# EAGLE board darwin-radio-panel2 (EAGLE 9.4.2)
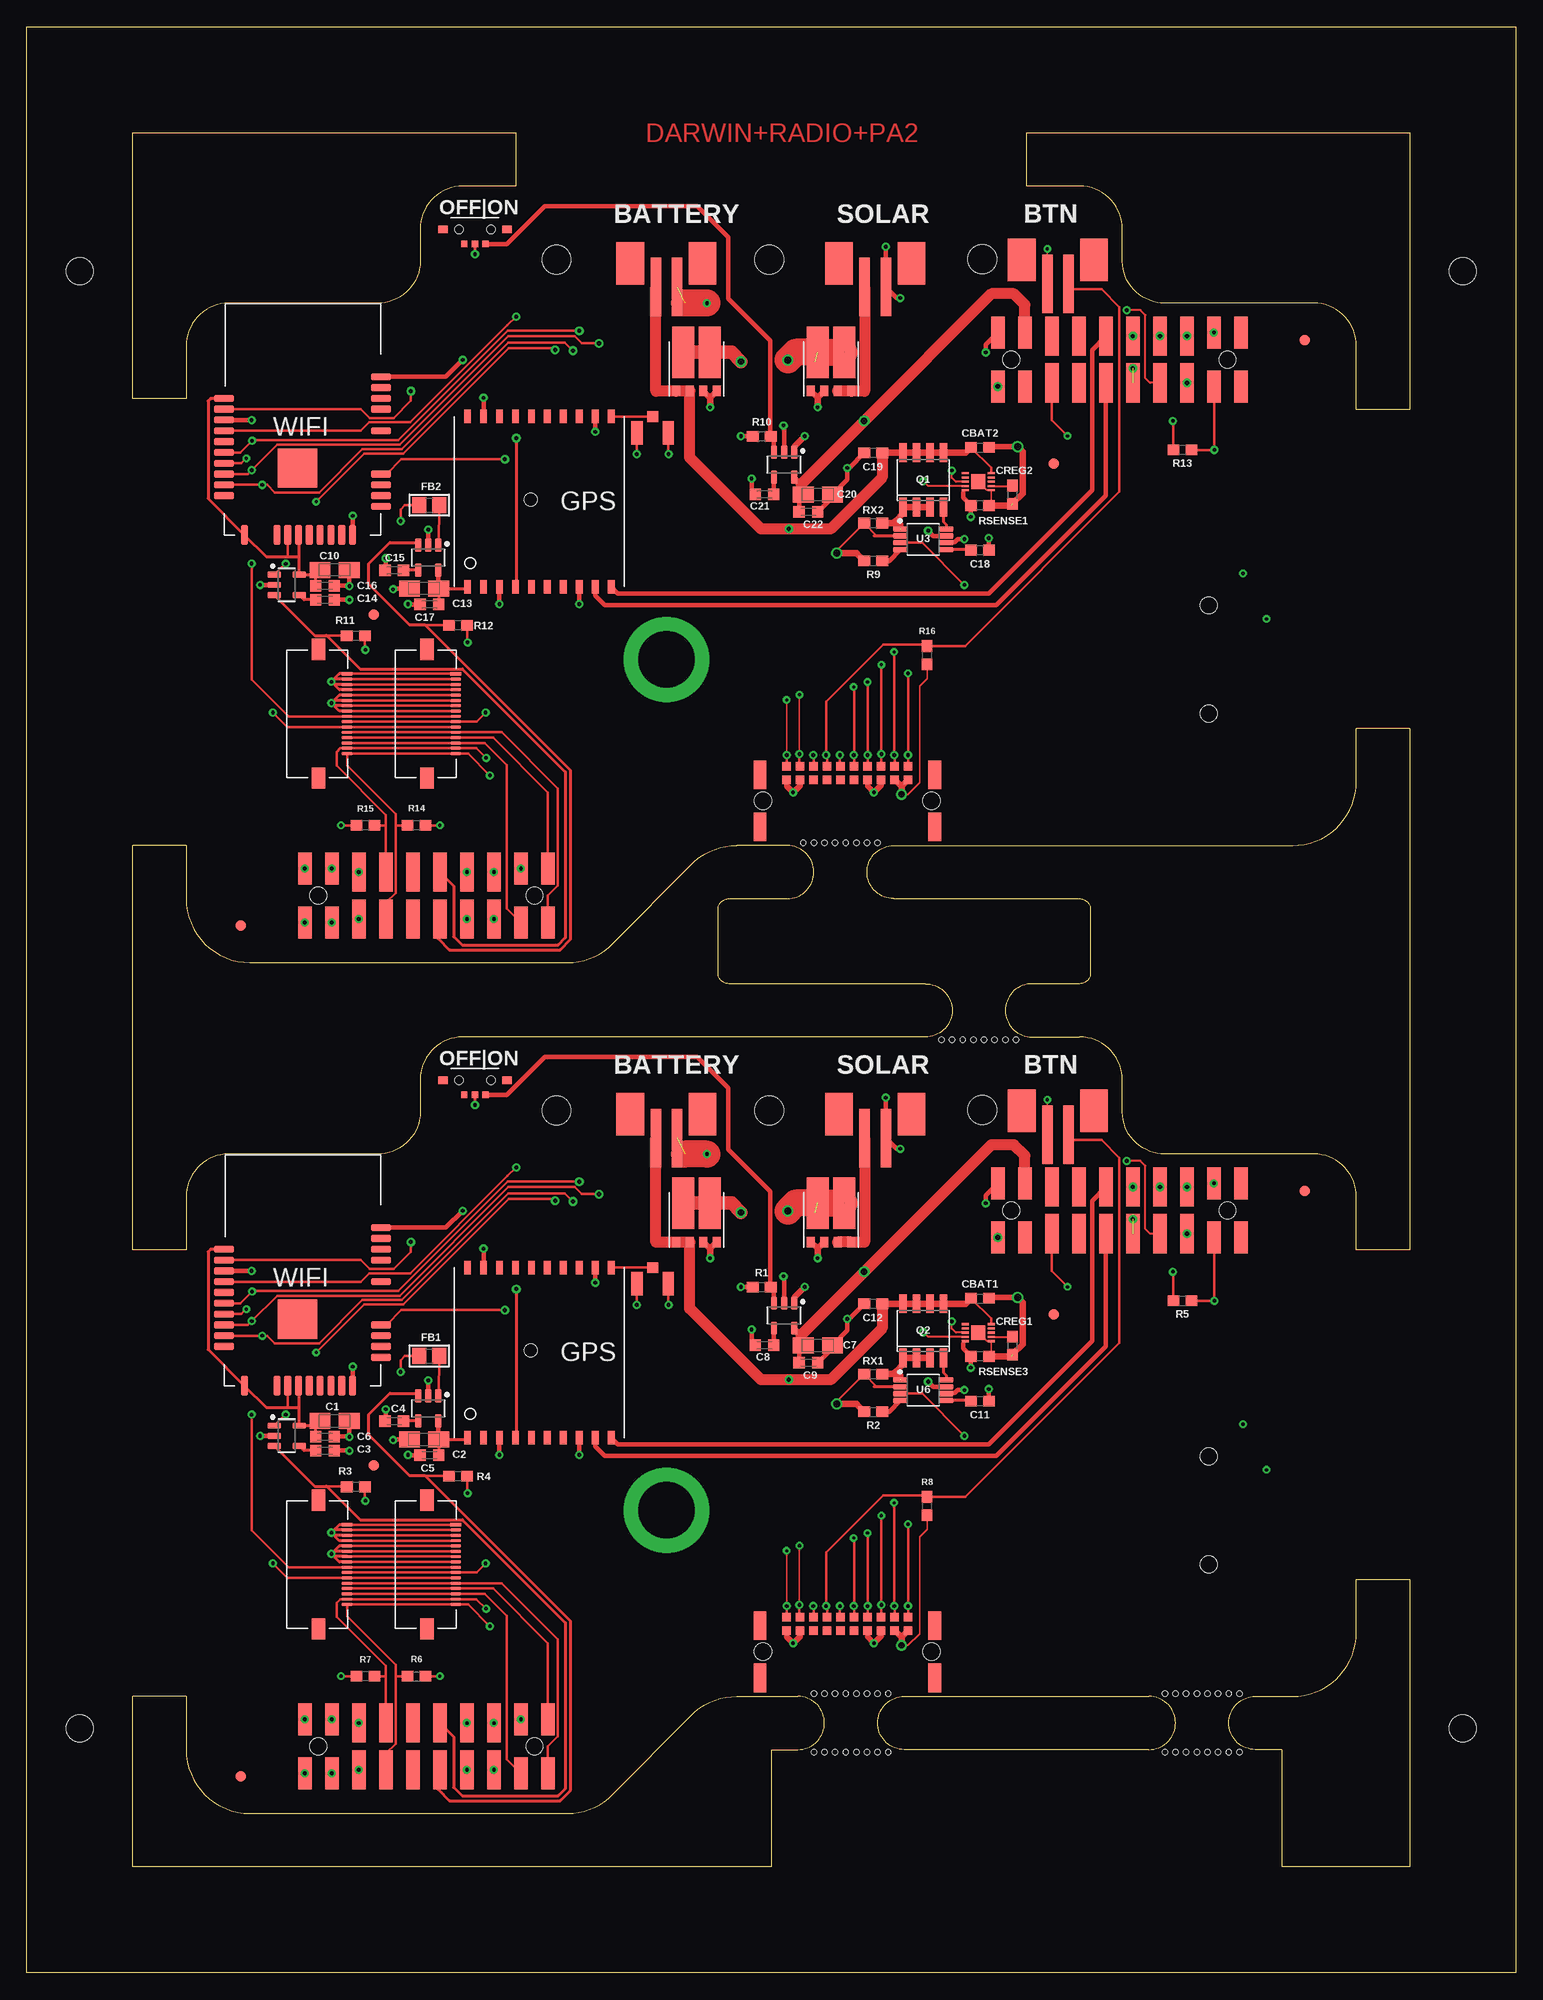
[diagram p0: board, top side]
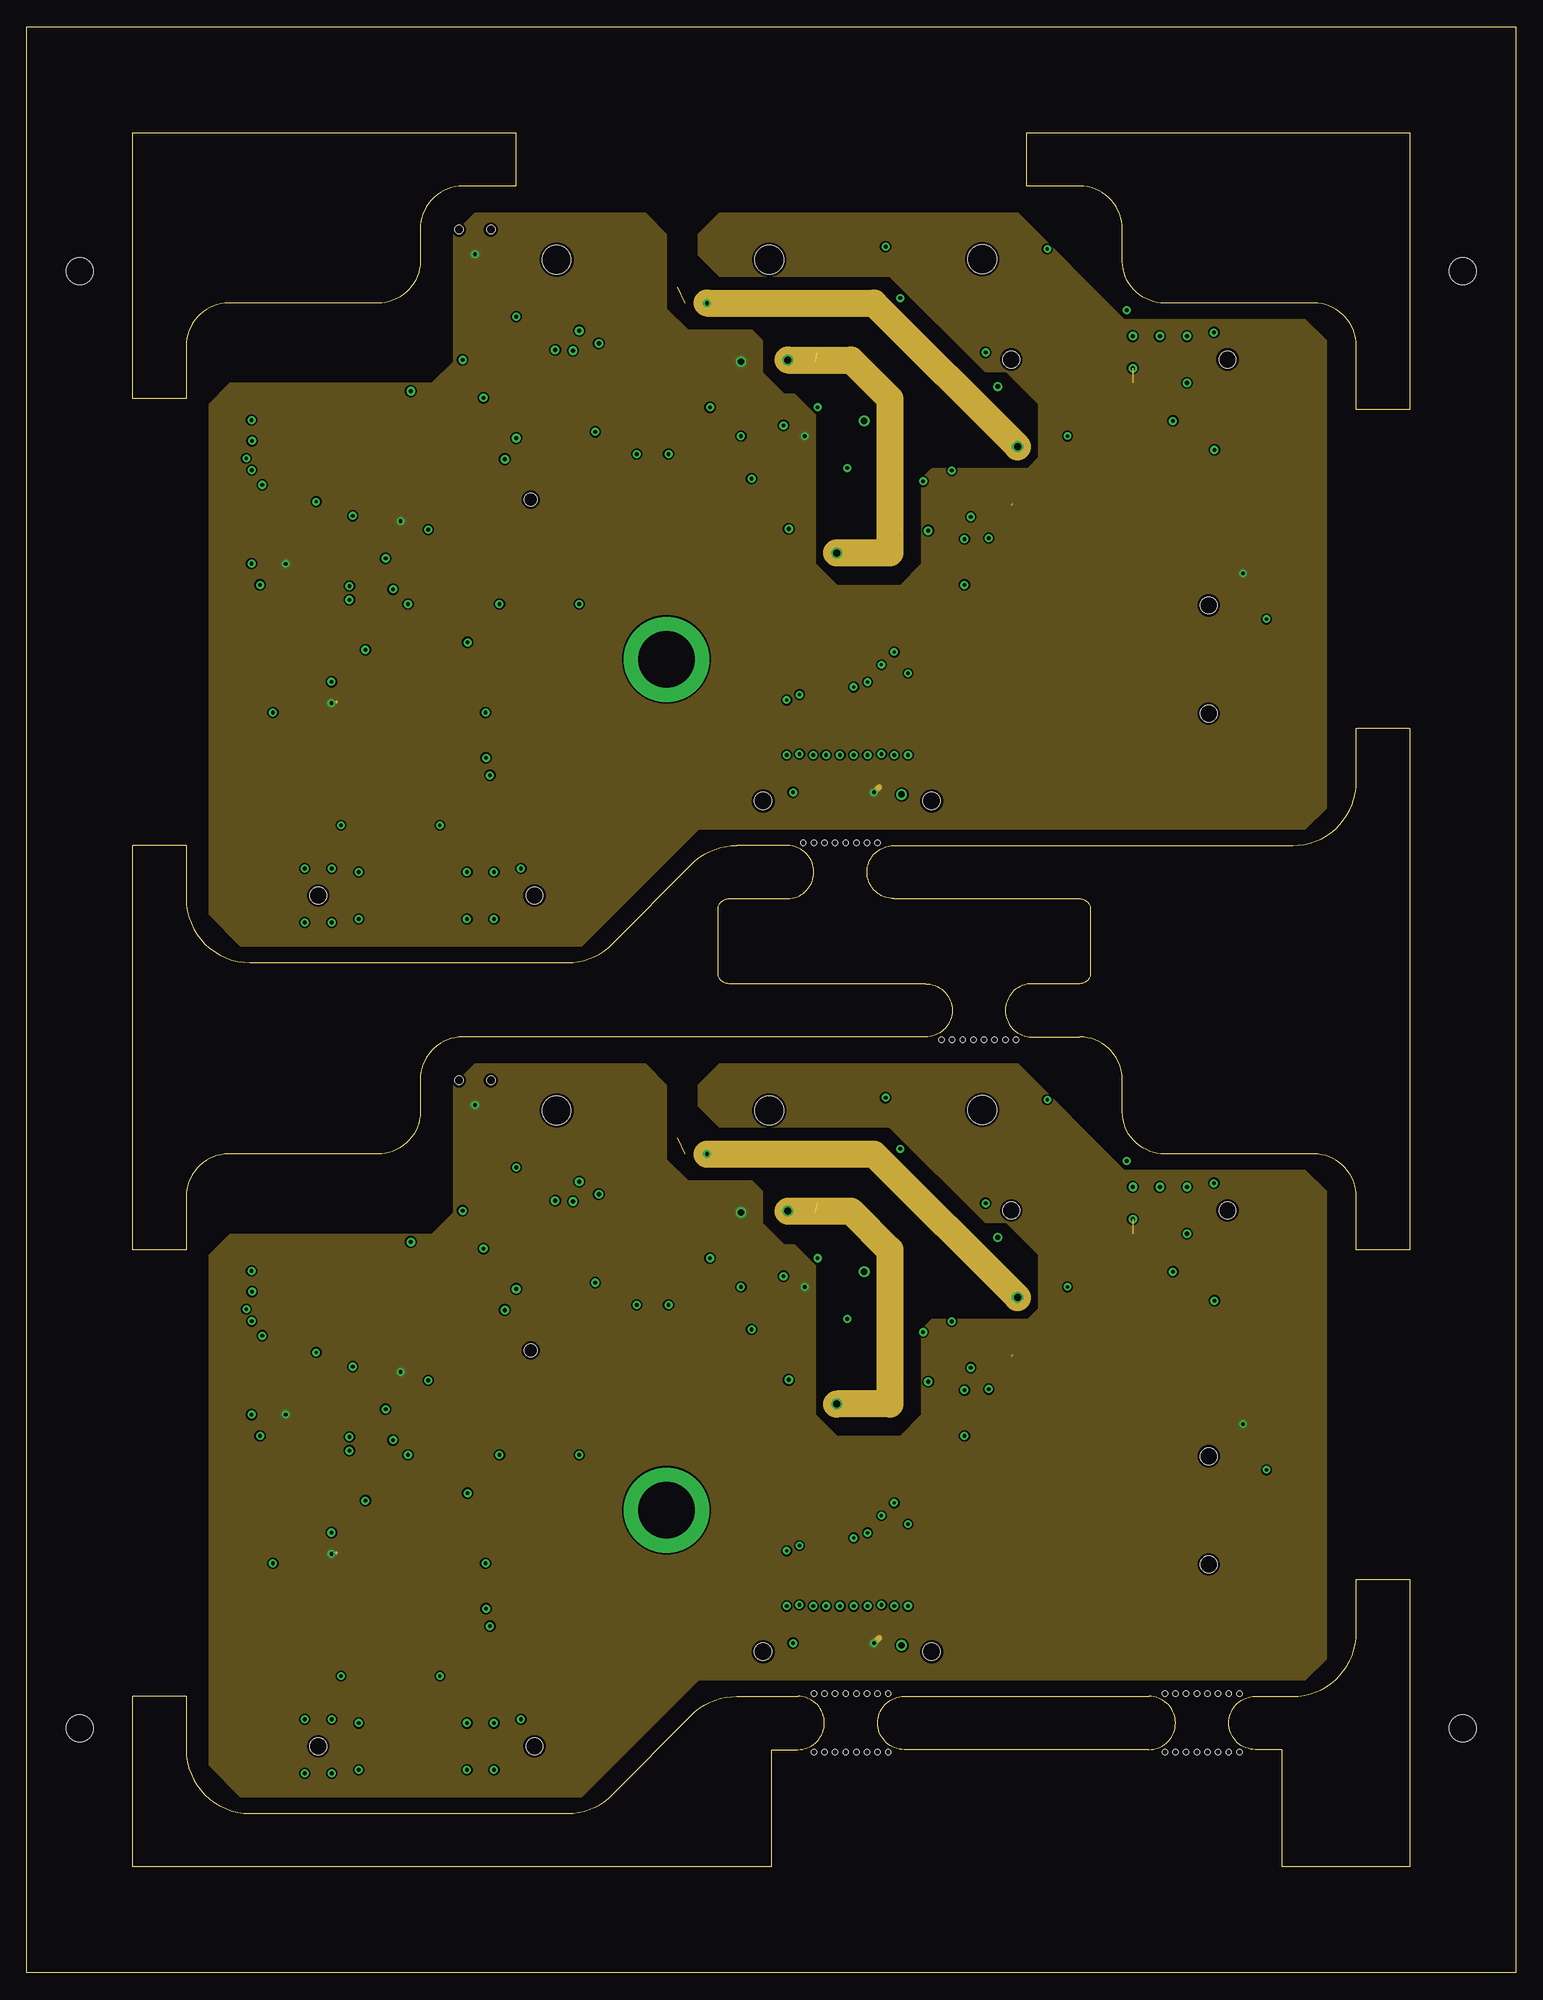
[diagram p1: board, inner layer PWR]
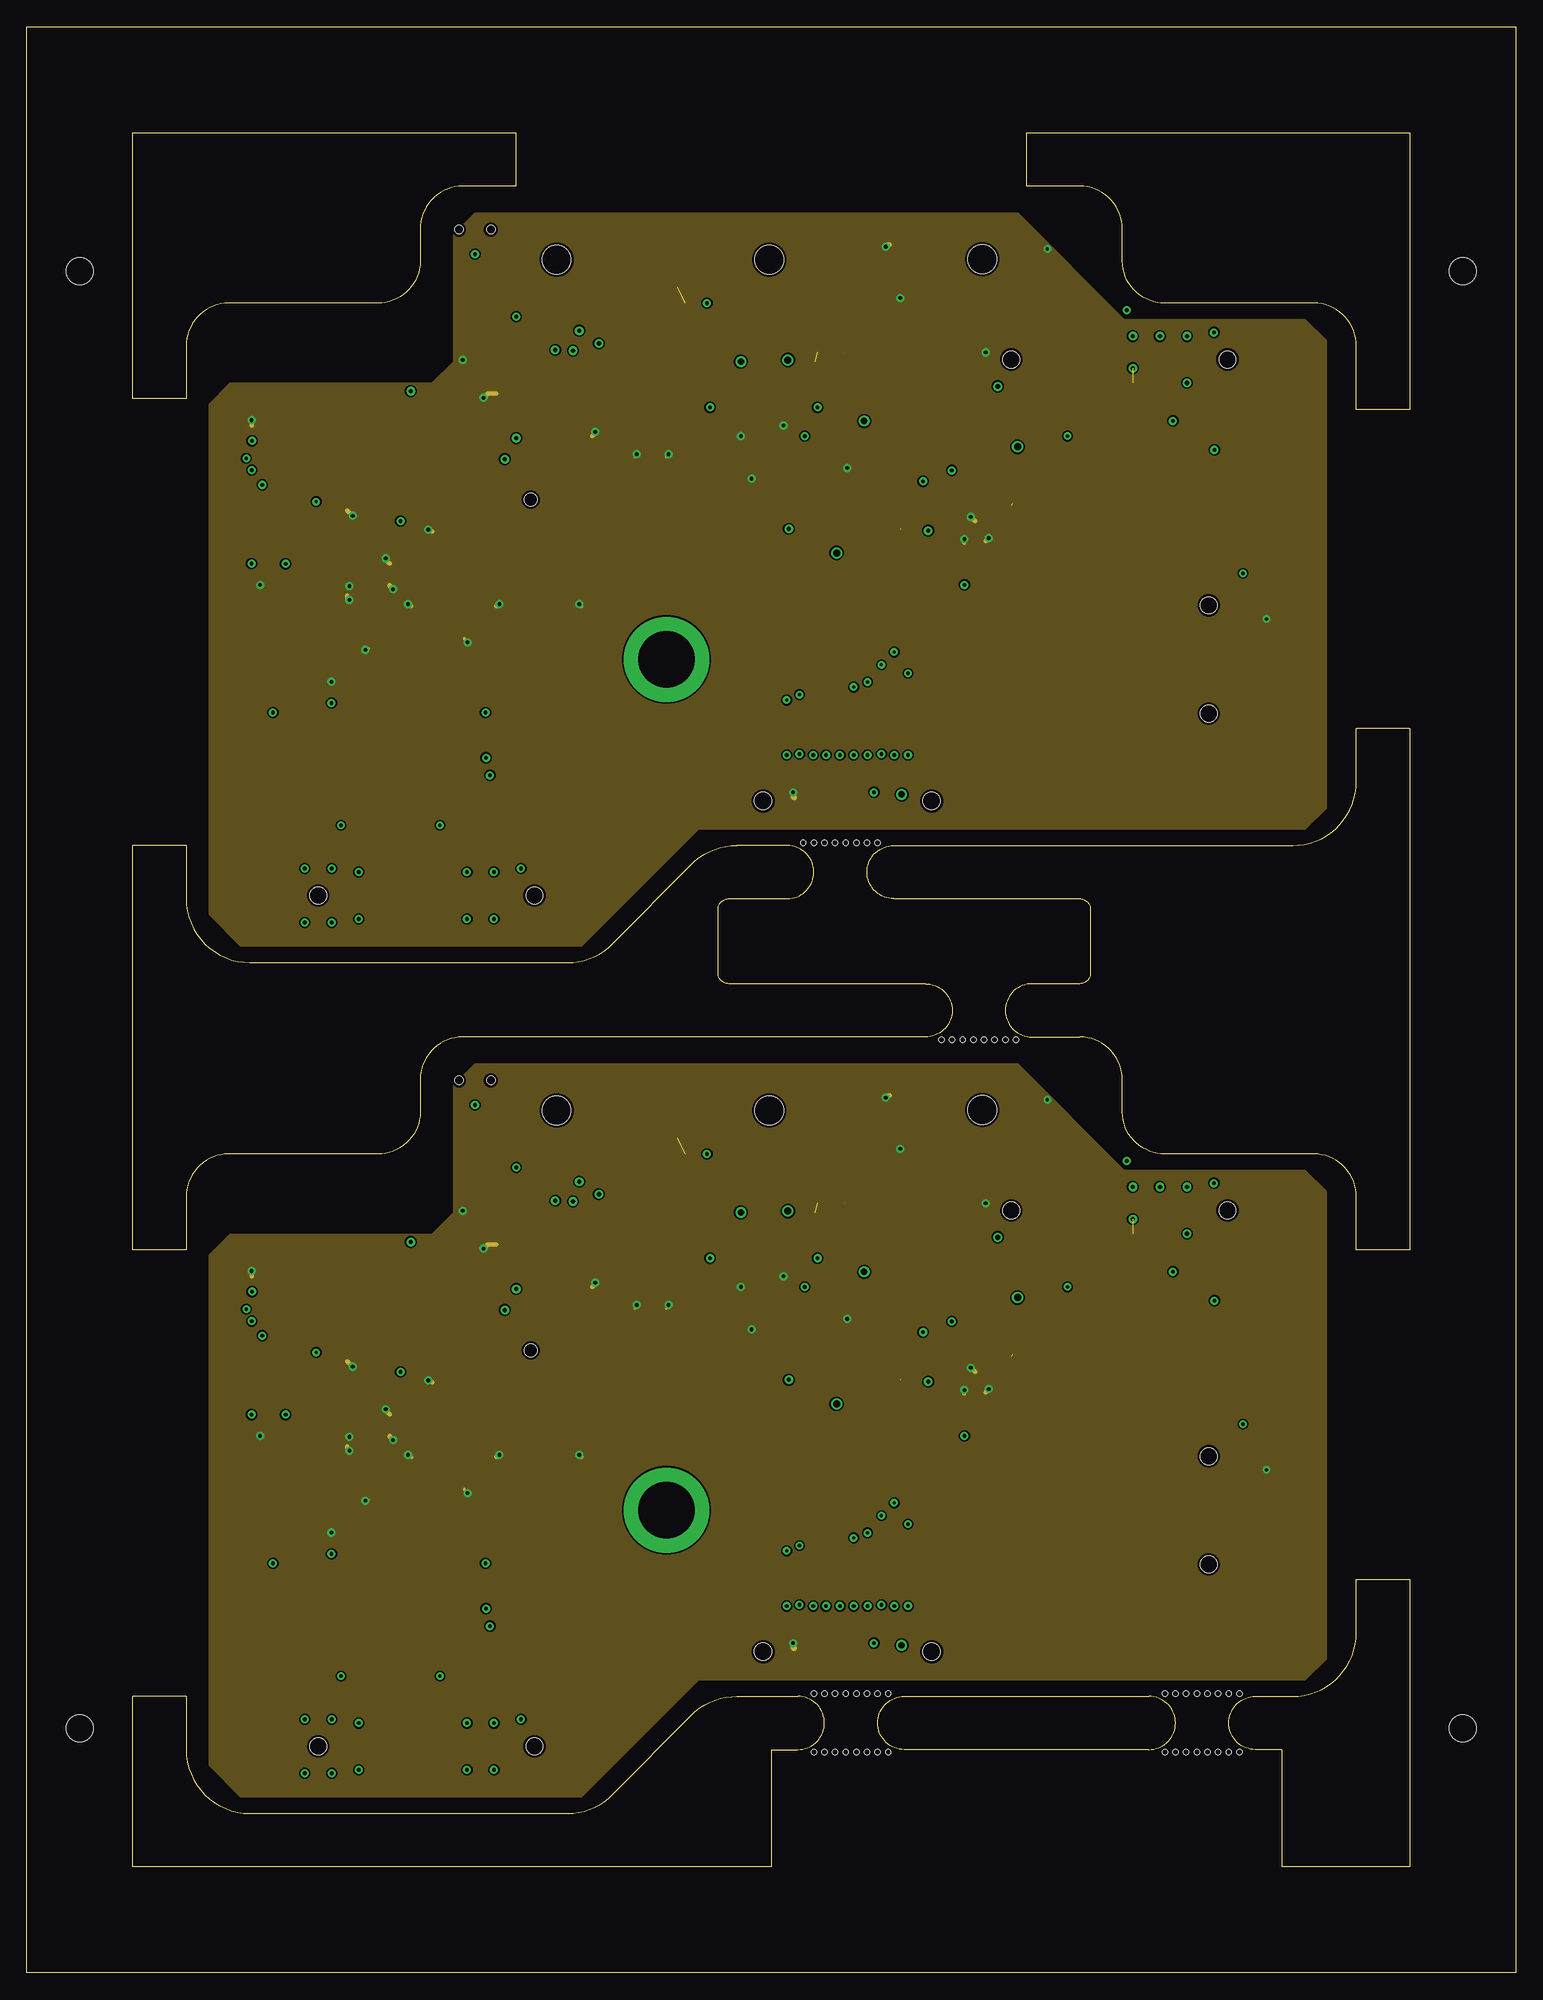
[diagram p2: board, inner layer GND]
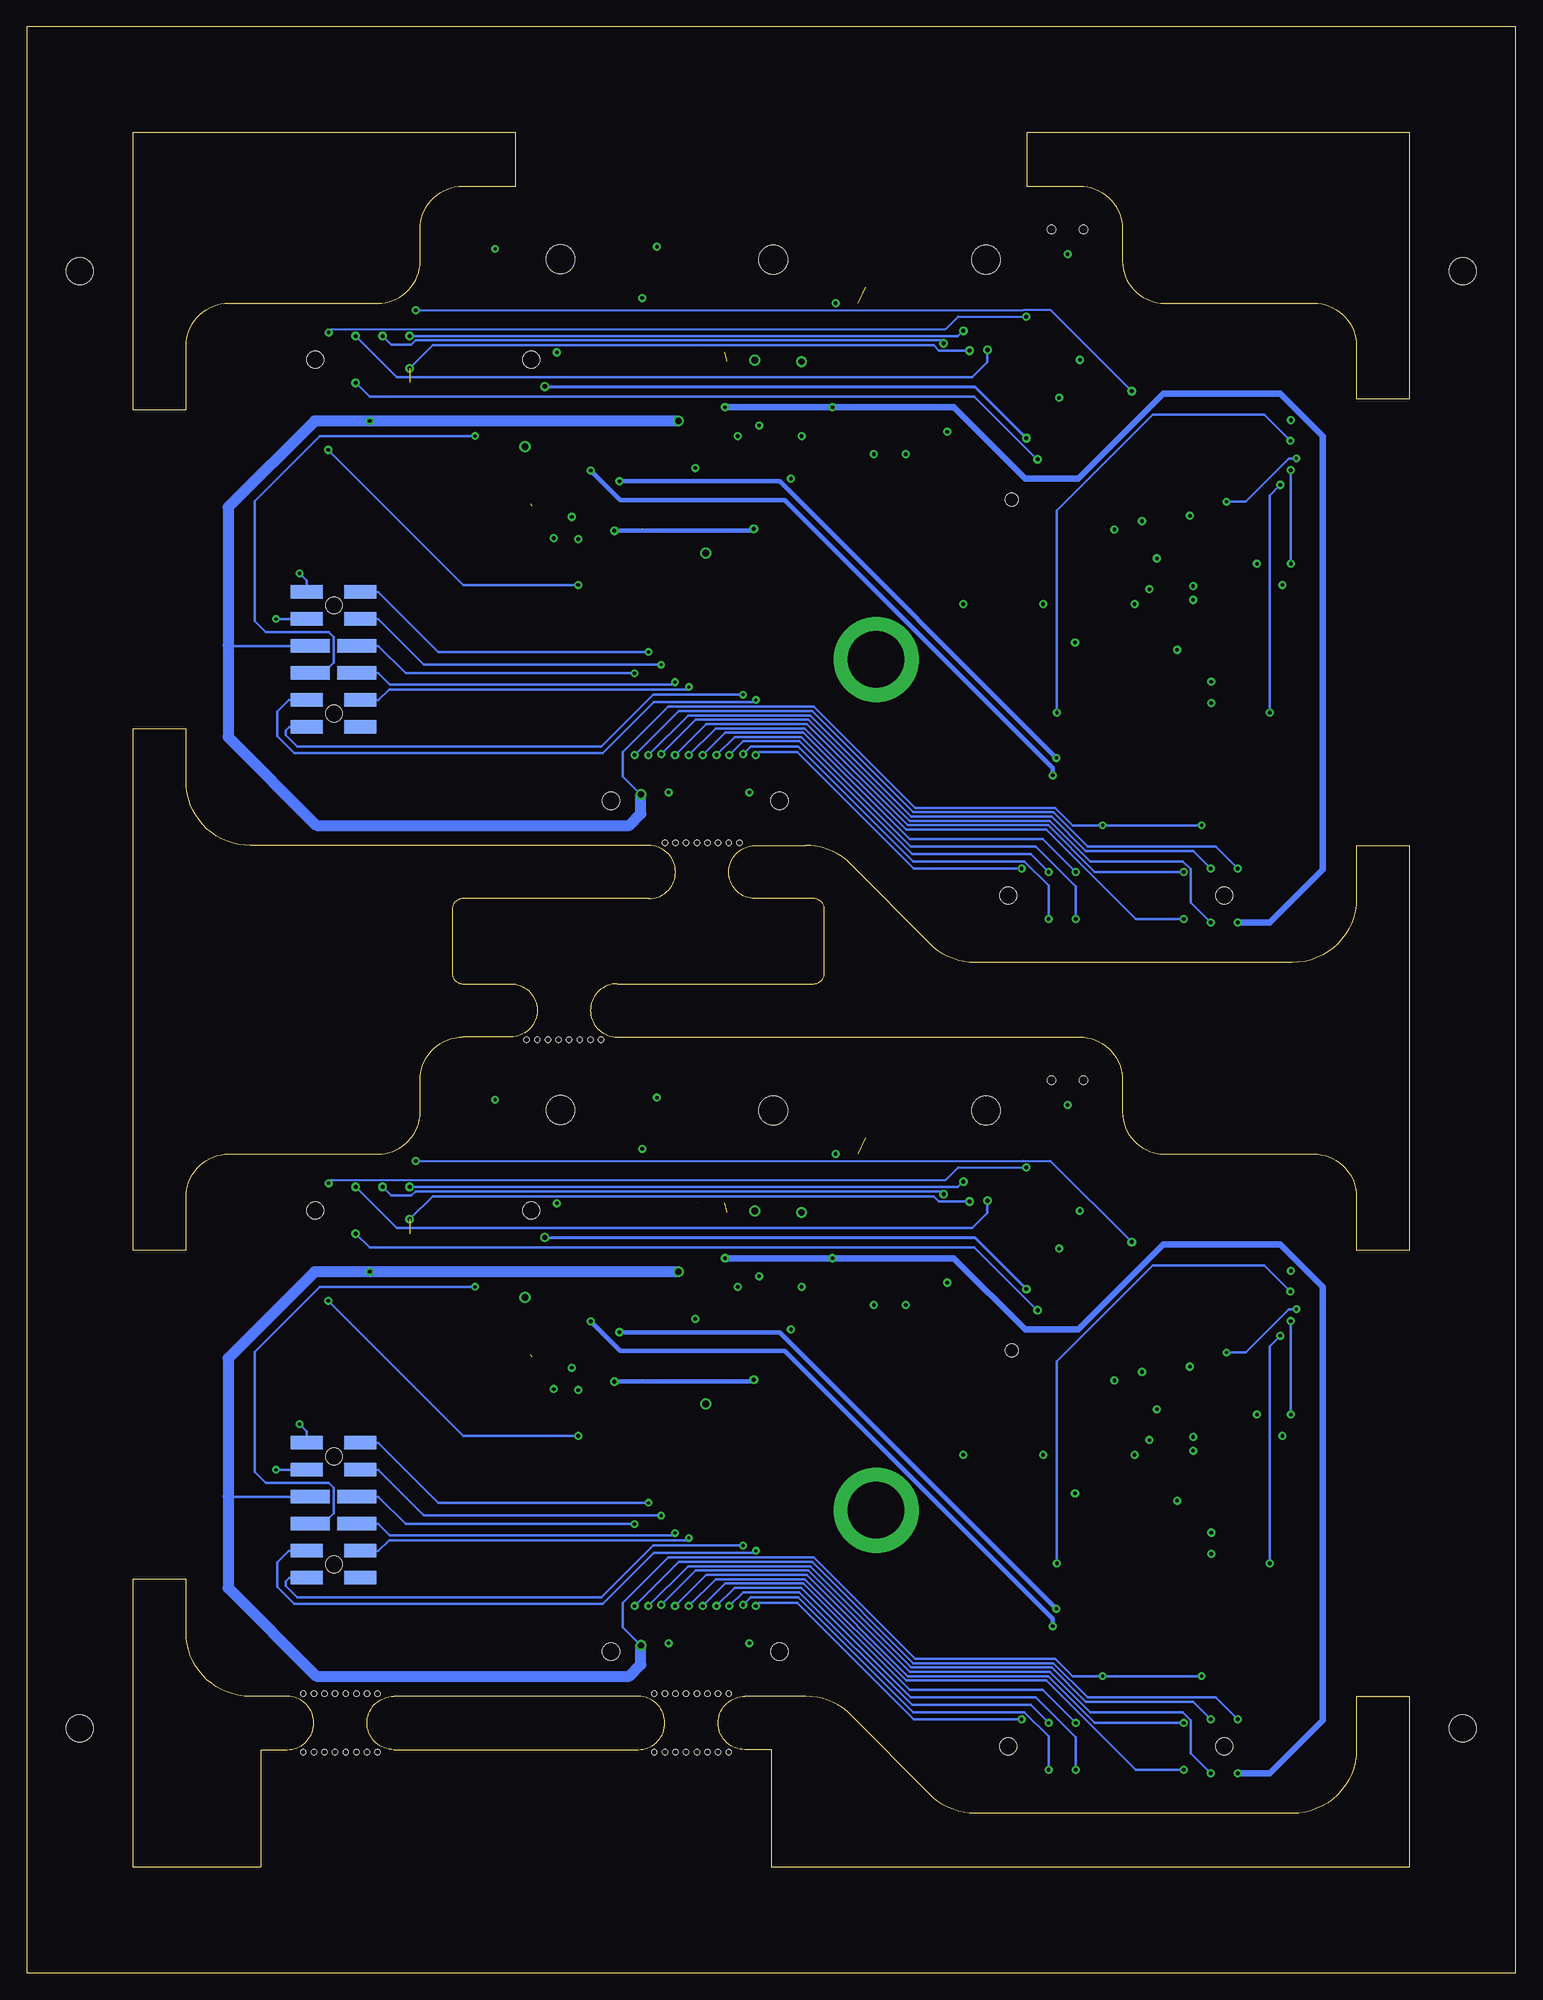
[diagram p3: board, bottom side, seen from below]

Size 140 x 183 mm. Coordinates in mm from the lower left corner, seen from the top.
Outline: 125,72.94 arc90 121,77 107,77 arc-90 103,80.94 103,83.94 arc90 99,88 94.5,88 arc-90 92,90.5 arc-90 94.5,93 99,93 arc90 100,94 100,100 arc90 99,101 81.5,101 arc-90 79,103.5 arc-90 81.5,106 119,106 arc90 125,112 125,117 130,117 130,68 125,68 125,72.94
Outline: 41,88 arc90 37,83.94 37,80.94 arc-90 33,77 19,77 arc90 15,72.94 15,68 10,68 10,106 15,106 15,101 arc90 21,95 50.85,95 arc45 55.11,96.78 62.49,104.22 arc-45 66.75,106 71.5,106 arc-90 74,103.5 arc-90 71.5,101 66,101 arc90 65,100 65,94 arc90 66,93 84.5,93 arc-90 87,90.5 arc-90 84.5,88 41,88
Outline: 15,21 arc90 21,15 50.85,15 arc45 55.11,16.78 62.49,24.23 arc-45 66.75,26 72.5,26 arc-90 75,23.5 arc-90 72.5,21 70,21 70,10 10,10 10,26 15,26 15,21
Outline: 119,26 arc90 125,32 125,37 130,37 130,10 118,10 118,21 115.5,21 arc-90 113,23.5 arc-90 115.5,26 119,26
Outline: 125,152.94 arc90 121,157 107,157 arc-90 103,160.94 103,163.94 arc90 99,168 94,168 94,173 130,173 130,147 125,147 125,152.94
Outline: 41,168 arc90 37,163.94 37,160.94 arc-90 33,157 19,157 arc90 15,152.94 15,148 10,148 10,173 46,173 46,168 41,168
Outline: 0,0 0,183 140,183 140,0 0,0
Outline: 82.5,21 arc-90 80,23.5 arc-90 82.5,26 105.5,26 arc-90 108,23.5 arc-90 105.5,21 82.5,21
Copper layers (1+2*15+16): Top 0.035mm / dielectric 1.5mm / PWR 0.035mm / dielectric 0.15mm / GND 0.035mm / dielectric 0.2mm / Bottom 0.035mm
Design rules "default *": minimum track width 6mil, minimum drill 0.3mm, track to track 6mil, track to pad 6mil, pad to pad 6mil, via to via 6mil, smd to smd 6mil, copper to edge 10mil, drill to drill 6mil, minimum pad ring 10mil, minimum via ring 8mil, stop-mask expansion 4mil, vias tented up to drill 1mm, thermal gap 10mil
Holes 2.7 mm at 49.82,81.08 69.82,81.08 89.82,81.13 49.82,161.08 69.82,161.08 89.82,161.13
Holes 2.54 mm at 5,160 135,160 135,23 5,23
Holes 0.5 mm at 73,106.25 74,106.25 75,106.25 76,106.25 77,106.25 78,106.25 79,106.25 80,106.25 93,87.75 92,87.75 91,87.75 90,87.75 89,87.75 88,87.75 87,87.75 86,87.75 74,20.75 75,20.75 76,20.75 77,20.75 78,20.75 79,20.75 80,20.75 81,20.75 74,26.25 75,26.25 76,26.25 77,26.25 78,26.25 79,26.25 80,26.25 81,26.25 107,20.75 108,20.75 109,20.75 110,20.75 111,20.75 112,20.75 113,20.75 114,20.75 107,26.25 108,26.25 109,26.25 110,26.25 111,26.25 112,26.25 113,26.25 114,26.25

## Footprints (pad centres in the part's own frame; a part is rotated, then mirrored left to right if it is on the bottom)
A/3216-18R = smd 1.95 x 1.5: + 1.375,0; - -1.375,0
C0603K = smd 1.05 x 1.08: 1 -0.875,0; 2 0.875,0
0603 = smd 1.1 x 1: 1 -0.85,0; 2 0.85,0
V10KL45DUHM3/H = smd 0.762 x 0.991: A1-1 -1.905,0.495; A1-2 -0.635,0.495; A2-1 0.635,0.495; A2-2 1.905,0.495 | smd 2.083 x 4.851: K1 -1.245,4.153; K2 1.245,4.153
0805 = smd 1.3 x 1.5: 1 -0.95,0; 2 0.95,0
FIDUCIAL_1MM = smd 1 x 1: 1 0,0
505110-1692 = smd 0.3 x 1: 1 -3.75,2.7; 2 -3.25,2.7; 3 -2.75,2.7; 4 -2.25,2.7; 5 -1.75,2.7; 6 -1.25,2.7; 7 -0.75,2.7; 8 -0.25,2.7; 9 0.25,2.7; 10 0.75,2.7; 11 1.25,2.7; 12 1.75,2.7; 13 2.25,2.7; 14 2.75,2.7; 15 3.25,2.7; 16 3.75,2.7 | smd 2 x 1.3: PAD1 -6.05,0; PAD2 6.05,0
M55-6102042R = smd 0.8 x 0.8: P1 -5.715,3.27; P2 -4.445,3.27; P3 -3.175,3.27; P4 -1.905,3.27; P5 -0.635,3.27; P6 0.635,3.27; P7 1.905,3.27; P8 3.175,3.27; P9 4.445,3.27; P10 5.715,3.27; P11 5.715,2; P12 4.445,2; P13 3.175,2; P14 1.905,2; P15 0.635,2; P16 -0.635,2; P17 -1.905,2; P18 -3.175,2; P19 -4.445,2; P20 -5.715,2 | smd 1.2 x 2.7: PAD0 -8.21,-2.45; PAD1 8.21,-2.45; PAD2 8.21,2.45; PAD3 -8.21,2.45 | hole 1.65: -7.925,0; 7.925,0
20PH = smd 3 x 1.27: PIN1 -0.34,0; PIN2 -0.34,-2.54; PIN9 -0.34,-20.32; PIN10 -0.34,-22.86; PIN11 4.74,-22.86; PIN12 4.74,-20.32; PIN19 4.74,-2.54; PIN20 4.74,0 | smd 3.68 x 1.27: PIN3 0,-5.08; PIN4 0,-7.62; PIN5 0,-10.16; PIN6 0,-12.7; PIN7 0,-15.24; PIN8 0,-17.78; PIN13 4.4,-17.78; PIN14 4.4,-15.24; PIN15 4.4,-12.7; PIN16 4.4,-10.16; PIN17 4.4,-7.62; PIN18 4.4,-5.08 | hole 1.58: 2.2,-1.27; 2.2,-21.59
SO08-IRF = smd 0.72 x 1.78: 1 -1.905,-2.543; 2 -0.635,-2.543; 3 0.635,-2.543; 4 1.905,-2.543; 5 1.905,2.543; 6 0.635,2.543; 7 -0.635,2.543; 8 -1.905,2.543
ATWINC = smd 1.9 x 0.7: 1 7.365,2.67; 2 7.365,3.686; 3 7.365,4.702; 4 7.365,5.718; 5 7.365,9.782; 6 7.365,11.814; 7 7.365,12.83; 8 7.365,13.846; 9 7.365,14.862; 10 -7.365,12.83; 11 -7.365,11.814; 12 -7.365,10.798; 13 -7.365,9.782; 14 -7.365,8.766; 15 -7.365,7.75; 16 -7.365,6.734; 17 -7.365,5.718; 18 -7.365,4.702; 19 -7.365,3.686 | smd 0.7 x 1.9: 20 -5.465,0; 21 -2.417,0; 22 -1.401,0; 23 -0.385,0; 24 0.631,0; 25 1.647,0; 26 2.663,0; 27 3.679,0; 28 4.695,0 | smd 3.7 x 3.7: PAD -0.485,6.27
SOP65P490X110-8 = smd 1.412 x 0.492: 1 -2.15,0.975; 2 -2.15,0.325; 3 -2.15,-0.325; 4 -2.15,-0.975; 5 2.15,-0.975; 6 2.15,-0.325; 7 2.15,0.325; 8 2.15,0.975
GPS_MODULE = smd 1.27 x 0.635: P$1 -8,6.75; P$2 -8,5.25; P$3 -8,3.75; P$4 -8,2.25; P$5 -8,0.75; P$6 -8,-0.75; P$7 -8,-2.25; P$8 -8,-3.75; P$9 -8,-5.25; P$10 -8,-6.75; P$11 8,-6.75; P$12 8,-5.25; P$13 8,-3.75; P$14 8,-2.25; P$15 8,-0.75; P$16 8,0.75; P$17 8,2.25; P$18 8,3.75; P$19 8,5.25; P$20 8,6.75 | hole 1.2: 0.2,0.8
SOT95P280X145-5 = smd 1.262 x 0.609: 1 -1.175,0.95; 2 -1.175,0; 3 -1.175,-0.95; 4 1.175,-0.95; 5 1.175,0.95
SSAJ110100 = smd 0.6 x 0.6: 1 1,1.355; 2 -1,1.355; C 0,1.355 | smd 0.9 x 0.7: PAD -3,0; PAD2 3,0 | hole 0.8: -1.5,0; 1.5,0
B2B-PH-SM4-TB = smd 1 x 5.5: + -1,-1; - 1,-1 | smd 2.6 x 4: PAD1 3.4,1.25; PAD2 -3.4,1.25
12PH = smd 3 x 1.27: 1 -2.5,6.35; 2 -2.5,3.81; 5 -2.5,-3.81; 6 -2.5,-6.35; 7 2.5,-6.35; 8 2.5,-3.81; 11 2.5,3.81; 12 2.5,6.35 | smd 3.68 x 1.27: 3 -2.2,1.27; 4 -2.2,-1.27; 9 2.2,-1.27; 10 2.2,1.27 | hole 1.58: 0.041,5.08; 0.041,-5.08
2337019-1 = smd 1.05 x 1: ANT 0,-1.525 | smd 1.05 x 2.2: GND -1.475,0; GND2 1.475,0
10DFN-EP = smd 0.2 x 0.65: P1 -0.8,-1.225; P2 -0.4,-1.225; P3 0,-1.225; P4 0.4,-1.225; P5 0.8,-1.225; P6 0.8,1.225; P7 0.4,1.225; P8 0,1.225; P9 -0.4,1.225; P10 -0.8,1.225 | smd 1.4 x 1.3: PAD 0,0

## Placement (x,y rotation side)
C1  6.8uf  [A/3216-18R]  28.94,51.91 180 top
C2  6.8uf  [A/3216-18R]  37.36,50.17 0 top
C3  [C0603K]  28.04,49.11 0 top
C4  [C0603K]  34.56,51.87 180 top
C5  .1uf  [C0603K]  37.86,48.67 180 top
C6  .1uf  [C0603K]  28.04,50.41 0 top
C7  6.8uf  [A/3216-18R]  74.38,59 180 top
C8  [C0603K]  69.36,59.04 180 top
C9  .1uf  [C0603K]  73.48,57.36 0 top
C10  6.8uf  [A/3216-18R]  28.94,131.91 180 top
C11  0.1uF  [0603]  89.61,53.77 0 top
C12  10uF  [0603]  79.58,62.92 180 top
C13  6.8uf  [A/3216-18R]  37.36,130.17 0 top
C14  [C0603K]  28.04,129.11 0 top
C15  [C0603K]  34.56,131.87 180 top
C16  .1uf  [C0603K]  28.04,130.41 0 top
C17  .1uf  [C0603K]  37.86,128.67 180 top
C18  0.1uF  [0603]  89.61,133.77 0 top
C19  10uF  [0603]  79.58,142.92 180 top
C20  6.8uf  [A/3216-18R]  74.38,139 180 top
C21  [C0603K]  69.36,139.04 180 top
C22  .1uf  [C0603K]  73.48,137.36 0 top
CBAT1  0.1uF  [0603]  89.61,63.43 0 top
CBAT2  0.1uF  [0603]  89.61,143.43 0 top
CREG1  10uF  [0603]  92.66,58.98 270 top
CREG2  10uF  [0603]  92.66,138.98 270 top
D1  V10KL45DUHM3/H  [V10KL45DUHM3/H]  62.97,68.23 0 top
D2  V10KL45DUHM3/H  [V10KL45DUHM3/H]  62.97,148.23 0 top
D3  V10KL45DUHM3/H  [V10KL45DUHM3/H]  75.61,68.23 0 top
D4  V10KL45DUHM3/H  [V10KL45DUHM3/H]  75.61,148.23 0 top
FB1  [0805]  37.85,58 0 top
FB2  [0805]  37.85,138 0 top
FID1  FIDUCIAL_1MM  [FIDUCIAL_1MM]  20.15,18.5 0 top
FID2  FIDUCIAL_1MM  [FIDUCIAL_1MM]  120.15,73.5 0 top
FID3  FIDUCIAL_1MM  [FIDUCIAL_1MM]  96.55,61.9 0 top
FID4  FIDUCIAL_1MM  [FIDUCIAL_1MM]  32.65,47.7 0 top
FID5  FIDUCIAL_1MM  [FIDUCIAL_1MM]  20.15,98.5 0 top
FID6  FIDUCIAL_1MM  [FIDUCIAL_1MM]  120.15,153.5 0 top
FID7  FIDUCIAL_1MM  [FIDUCIAL_1MM]  96.55,141.9 0 top
FID8  FIDUCIAL_1MM  [FIDUCIAL_1MM]  32.65,127.7 0 top
J1  505110-1692  [505110-1692]  27.43,38.4 270 top
J2  505110-1692  [505110-1692]  37.64,38.4 270 top
J3  M55-6102042R  [M55-6102042R]  77.15,30.2 0 top
J4  505110-1692  [505110-1692]  27.43,118.4 270 top
J5  505110-1692  [505110-1692]  37.64,118.4 270 top
J6  M55-6102042R  [M55-6102042R]  77.15,110.2 0 top
LOWER1  MOLEX-15-91-2200  [20PH]  49.01,23.5 270 top
LOWER2  MOLEX-15-91-2200  [20PH]  49.01,103.5 270 top
Q1  NDS8434  [SO08-IRF]  84.28,140.38 0 top
Q2  NDS8434  [SO08-IRF]  84.28,60.38 0 top
R1  100k  [0603]  69.11,64.48 0 top
R2  100k  [0603]  79.58,52.76 0 top
R3  100k  [0603]  30.95,45.7 180 top
R4  100k  [0603]  40.55,46.7 180 top
R5  100k  [0603]  108.65,63.2 0 top
R6  100k  [0603]  36.65,27.9 0 top
R7  100k  [0603]  31.85,27.9 180 top
R8  100k  [0603]  84.65,43.9 90 top
R9  100k  [0603]  79.58,132.76 0 top
R10  100k  [0603]  69.11,144.48 0 top
R11  100k  [0603]  30.95,125.7 180 top
R12  100k  [0603]  40.55,126.7 180 top
R13  100k  [0603]  108.65,143.2 0 top
R14  100k  [0603]  36.65,107.9 0 top
R15  100k  [0603]  31.85,107.9 180 top
R16  100k  [0603]  84.65,123.9 90 top
RSENSE1  100M  [0603]  89.61,137.97 180 top
RSENSE3  100M  [0603]  89.61,57.97 180 top
RX1  100M  [0603]  79.58,56.31 0 top
RX2  100M  [0603]  79.58,136.31 0 top
U1  ATWINC  [ATWINC]  25.94,55.21 0 top
U2  ATWINC  [ATWINC]  25.94,135.21 0 top
U3  MCP7384X  [SOP65P490X110-8]  84.28,134.79 0 top
U6  MCP7384X  [SOP65P490X110-8]  84.28,54.79 0 top
U$1  FGPMMOPA6H  [GPS_MODULE]  48.2,58.33 90 top
U$2  MIC5219-3.3YM5-TR  [SOT95P280X145-5]  37.76,53.07 270 top
U$3  MIC5219-3.3YM5-TR  [SOT95P280X145-5]  24.44,50.51 0 top
U$4  MIC5219-3.3YM5-TR  [SOT95P280X145-5]  71.2,61.8 270 top
U$5  SSAJ110100  [SSAJ110100]  42.14,83.92 180 top
U$6  B2B-PH-SM4-TB  [B2B-PH-SM4-TB]  79.78,79.5 0 top
U$7  B2B-PH-SM4-TB  [B2B-PH-SM4-TB]  60.15,79.5 0 top
U$8  2X6-HEADERSDS  [12PH]  111.15,43.5 0 bottom
U$9  B2B-PH-SM4-TB  [B2B-PH-SM4-TB]  96.95,79.8 0 top
U$10  FGPMMOPA6H  [GPS_MODULE]  48.2,138.33 90 top
U$11  2337019-1  [2337019-1]  58.85,64.8 180 top
U$12  MAX17055  [10DFN-EP]  89.45,60.2 270 top
U$13  MIC5219-3.3YM5-TR  [SOT95P280X145-5]  37.76,133.07 270 top
U$14  MIC5219-3.3YM5-TR  [SOT95P280X145-5]  24.44,130.51 0 top
U$15  MIC5219-3.3YM5-TR  [SOT95P280X145-5]  71.2,141.8 270 top
U$16  SSAJ110100  [SSAJ110100]  42.14,163.92 180 top
U$17  B2B-PH-SM4-TB  [B2B-PH-SM4-TB]  79.78,159.5 0 top
U$18  B2B-PH-SM4-TB  [B2B-PH-SM4-TB]  60.15,159.5 0 top
U$19  MAX17055  [10DFN-EP]  89.45,140.2 270 top
U$20  2337019-1  [2337019-1]  58.85,144.8 180 top
U$21  2X6-HEADERSDS  [12PH]  111.15,123.5 0 bottom
U$22  B2B-PH-SM4-TB  [B2B-PH-SM4-TB]  96.95,159.8 0 top
UPPER1  MOLEX-15-91-2200  [20PH]  91.29,69.5 90 top
UPPER2  MOLEX-15-91-2200  [20PH]  91.29,149.5 90 top

## Library data of the parts
C1-C10 C13-C17 C20-C22 = rcl; SPICEPREFIX: C
C11 C18 CBAT1 CBAT2 = SparkFun-Capacitors; PROD_ID: CAP-00810
C12 C19 CREG1 CREG2 = SparkFun-Capacitors; PROD_ID: CAP-11015
D1-D4 J1-J6 LOWER1 LOWER2 Q1 Q2 U1-U3 U6 U$1-U$22 UPPER1 UPPER2 = Conservify
FB1 FB2 = microbuilder
FID1-FID8 = microbuilder; BOM: EXCLUDE
R1-R16 = SparkFun-Resistors; PROD_ID: RES-07828
RSENSE1 RSENSE3 RX1 RX2 = SparkFun-Resistors; PROD_ID: RES-07868

## Nets
3V1: C20.+ C22.1 J6.P11 J6.P12 R13.1 R14.2 R15.2 R16.1 U$15.5 U$21.3 UPPER2.PIN19
3V3: C7.+ C9.1 J3.P11 J3.P12 R5.1 R6.2 R7.2 R8.1 U$4.5 U$8.3 UPPER1.PIN19
BACKPACK_ENABLE: U$8.4 UPPER1.PIN3
BACKPACK_ENABLE1: U$21.4 UPPER2.PIN3
BAT+: C12.1 CBAT1.1 D1.A1-1 D1.A1-2 Q2.5 Q2.6 Q2.7 Q2.8 U6.7 U$7.+ U$12.P10
BAT+1: C19.1 CBAT2.1 D2.A1-1 D2.A1-2 Q1.5 Q1.6 Q1.7 Q1.8 U3.7 U$18.+ U$19.P10
BAT-: CBAT1.2 CREG1.2 RSENSE3.1 U$7.- U$12.P6 U$12.PAD
BAT-1: CBAT2.2 CREG2.2 RSENSE1.1 U$18.- U$19.P6 U$19.PAD
CHARGESUPPLY: D3.K1 D3.K2 R2.1 RX1.1 U6.2
CHARGESUPPLY1: D4.K1 D4.K2 R9.1 RX2.1 U3.2
CHARGING: R5.2 U6.3 UPPER1.PIN9
CHARGING1: R13.2 U3.3 UPPER2.PIN9
D+: LOWER1.PIN6
D+1: LOWER2.PIN6
D-: LOWER1.PIN15
D-1: LOWER2.PIN15
EEPROM_PROT: J3.P1 LOWER1.PIN2 U$8.5
EEPROM_PROT1: J6.P1 LOWER2.PIN2 U$21.5
GND: C1.- C2.- C3.2 C4.2 C5.2 C6.2 C7.- C8.2 C9.2 C11.2 C12.2 J1.1 J1.2 J1.3 J1.4 J2.1 J2.2 J2.3 J2.4 J3.P19 J3.P20 R1.1 R3.1 R4.1 RSENSE3.2 U1.9 U1.12 U1.28 U6.6 U$1.P$3 U$1.P$8 U$1.P$12 U$1.P$19 U$2.2 U$3.2 U$4.2 U$6.- U$8.2 U$9.+ U$11.GND U$11.GND2 U$12.P5 UPPER1.PIN20
GND1: C10.- C13.- C14.2 C15.2 C16.2 C17.2 C18.2 C19.2 C20.- C21.2 C22.2 J4.1 J4.2 J4.3 J4.4 J5.1 J5.2 J5.3 J5.4 J6.P19 J6.P20 R10.1 R11.1 R12.1 RSENSE1.2 U2.9 U2.12 U2.28 U3.6 U$10.P$3 U$10.P$8 U$10.P$12 U$10.P$19 U$13.2 U$14.2 U$15.2 U$17.- U$19.P5 U$20.GND U$20.GND2 U$21.2 U$22.+ UPPER2.PIN20
GPS_ENABLE: LOWER1.PIN16 R4.2 U$2.3
GPS_ENABLE1: LOWER2.PIN16 R12.2 U$13.3
GPS_RX: U$1.P$9 UPPER1.PIN5
GPS_RX1: U$10.P$9 UPPER2.PIN5
GPS_TX: U$1.P$10 UPPER1.PIN16
GPS_TX1: U$10.P$10 UPPER2.PIN16
HOTSWAP_INT: J3.P3 LOWER1.PIN3
HOTSWAP_INT1: J6.P3 LOWER2.PIN3
MOD_G0: J1.13 J2.13 LOWER1.PIN1
MOD_G1: J4.13 J5.13 LOWER2.PIN1
MOD_G2: J3.P2 LOWER1.PIN18 U$8.6
MOD_G3: J6.P2 LOWER2.PIN18 U$21.6
MOD_G4: J6.P5 LOWER2.PIN4
MOD_G5: J3.P5 LOWER1.PIN4
MOD_G6: J4.14 J5.14 LOWER2.PIN19
MOD_G7: J4.12 J5.12 LOWER2.PIN20
MOD_G13: J1.14 J2.14 LOWER1.PIN19
MOD_G14: J1.12 J2.12 LOWER1.PIN20
MOD_MISO: J3.P10 LOWER1.PIN10 U$8.10
MOD_MISO1: J6.P10 LOWER2.PIN10 U$21.10
MOD_MOSI: J3.P8 LOWER1.PIN12 U$8.11
MOD_MOSI1: J6.P8 LOWER2.PIN12 U$21.11
MOD_SCK: J3.P9 LOWER1.PIN9 U$8.12
MOD_SCK1: J6.P9 LOWER2.PIN9 U$21.12
MOD_SCL: J3.P6 LOWER1.PIN13 U$8.8
MOD_SCL1: J6.P6 LOWER2.PIN13 U$21.8
MOD_SDA: J3.P7 LOWER1.PIN8 U$8.9
MOD_SDA1: J6.P7 LOWER2.PIN8 U$21.9
N$1: C3.1 U$3.4
N$2: C4.1 U$2.4
N$3: C2.+ C5.1 U$1.P$1 U$2.5
N$4: U$1.P$11 U$11.ANT
N$5: R2.2 U6.4
N$6: C8.1 U$4.4
N$7: FB1.2 U$2.1
N$8: R1.2 U$4.3 U$5.2
N$11: C14.1 U$14.4
N$12: C15.1 U$13.4
N$13: C13.+ C17.1 U$10.P$1 U$13.5
N$14: Q2.1 Q2.2 Q2.3 RX1.2 U6.1
N$16: Q1.1 Q1.2 Q1.3 RX2.2 U3.1
N$17: Q2.4 U6.8
N$18: C11.1 U6.5
N$19: CREG1.1 U$12.P7
N$20: Q1.4 U3.8
N$21: C18.1 U3.5
N$22: CREG2.1 U$19.P7
N$23: R9.2 U3.4
N$24: C21.1 U$15.4
N$25: R10.2 U$15.3 U$16.2
N$26: U$10.P$11 U$20.ANT
N$27: FB2.2 U$13.1
PIN1: U$21.7
PIN7: U$8.7
RAD_SCL: J1.16 J2.16 LOWER1.PIN14 R6.1 U$12.P3
RAD_SCL1: J4.16 J5.16 LOWER2.PIN14 R14.1 U$19.P3
RAD_SDA: J1.15 J2.15 LOWER1.PIN7 R7.1 U$12.P4
RAD_SDA1: J4.15 J5.15 LOWER2.PIN7 R15.1 U$19.P4
RADIO_MISO: J1.9 J2.9 U1.17 UPPER1.PIN14
RADIO_MISO1: J4.9 J5.9 U2.17 UPPER2.PIN14
RADIO_MOSI: J1.10 J2.10 U1.15 UPPER1.PIN15
RADIO_MOSI1: J4.10 J5.10 U2.15 UPPER2.PIN15
RADIO_SCK: J1.11 J2.11 U1.18 UPPER1.PIN6
RADIO_SCK1: J4.11 J5.11 U2.18 UPPER2.PIN6
RESET: UPPER1.PIN4
RESET1: UPPER2.PIN4
SOL+: D3.A2-1 D3.A2-2 U$6.+
SOL+1: D4.A2-1 D4.A2-2 U$17.+
SWCLK: UPPER1.PIN10
SWCLK1: UPPER2.PIN10
SWDIO: UPPER1.PIN11
SWDIO1: UPPER2.PIN11
UNREG: D1.K1 D1.K2 FB1.1 J1.5 J1.6 J1.7 J1.8 J2.5 J2.6 J2.7 J2.8 J3.P13 J3.P14 U$3.1 U$4.1 U$5.C U$8.1
UNREG1: D2.K1 D2.K2 FB2.1 J4.5 J4.6 J4.7 J4.8 J5.5 J5.6 J5.7 J5.8 J6.P13 J6.P14 U$14.1 U$15.1 U$16.C U$21.1
V1: D2.A2-1 D2.A2-2 D4.A1-1 D4.A1-2 LOWER2.PIN11
V5: D1.A2-1 D1.A2-2 D3.A1-1 D3.A1-2 LOWER1.PIN11
VBACKUP: U$1.P$4 UPPER1.PIN1
VBACKUP1: U$10.P$4 UPPER2.PIN1
WIFI_3V1: C10.+ C16.1 U2.10 U2.20 U2.22 U2.23 U$14.5
WIFI_3V3: C1.+ C6.1 U1.10 U1.20 U1.22 U1.23 U$3.5
WIFI_CS: U1.16 UPPER1.PIN13
WIFI_CS1: U2.16 UPPER2.PIN13
WIFI_ENABLE: LOWER1.PIN5 R3.2 U$3.3
WIFI_ENABLE1: LOWER2.PIN5 R11.2 U$14.3
WIFI_IRQ: U1.13 UPPER1.PIN12
WIFI_IRQ1: U2.13 UPPER2.PIN12
WIFI_RST: U1.4 UPPER1.PIN8
WIFI_RST1: U2.4 UPPER2.PIN8
WIFI_WAKE: U1.11 UPPER1.PIN7
WIFI_WAKE1: U2.11 UPPER2.PIN7
X1: UPPER2.PIN2
X2: UPPER1.PIN2
X3: UPPER2.PIN17
X4: UPPER1.PIN17
X5: UPPER1.PIN18
X6: UPPER2.PIN18
XBTN: J3.P4 LOWER1.PIN17 R8.2 U$9.-
XBTN1: J6.P4 LOWER2.PIN17 R16.2 U$22.-
XX1: J3.P18
XX2: J3.P17
XX3: J3.P16
XX4: J3.P15
XX5: J6.P16
XX6: J6.P18
XX7: J6.P17
XX8: J6.P15

## Tracks (layer width: path | path; a pad name or v marks a point on that pad's centre or on a via)
3V1  (via drill 0.3, 0.35, 0.6)
  Top 0.152: R16.1 84.65,121.7 83.95,121 83.95,111.9 82.85,110.8 v82.25,110.8
  Top 0.254: R13.1 107.8,145.87 v107.75,145.92 | R15.2 v29.55,107.9 | R14.2 v38.85,107.9
  Top 0.406: U$15.5 72.79,139.98 73.01,139.77 C20.+ 72.61,138.6 C22.1
  Top 0.61: J6.P11 82.25,111.58 v82.25,110.8 82.25,111.55 J6.P12
  Top 1.016: UPPER2.PIN19 93.83,156.85 92.81,157.87 90.68,157.87 v78.73,145.92 72.79,139.98
  Bottom 0.152: 121.02,124.77 121.05,124.8
  Bottom 0.254: v82.25,110.8 83.95,112.5 83.95,114.8 79.7,119.05 66,119.05 56.48,109.53 43.31,109.53 41.68,107.9 v38.85,107.9 v29.55,107.9 | U$21.3 121.02,124.77
  Bottom 1.016: v78.73,145.92 v107.75,145.92 112.93,145.92 121.05,137.8 121.05,124.8 121.05,116.2 112.75,107.9 83.35,107.9 82.25,109 v82.25,110.8
3V3  (via drill 0.3, 0.35, 0.6)
  Top 0.152: R8.1 84.65,41.7 83.95,41 83.95,31.9 82.85,30.8 v82.25,30.8
  Top 0.254: R5.1 107.8,65.87 v107.75,65.92 | R7.2 v29.55,27.9 | R6.2 v38.85,27.9
  Top 0.406: U$4.5 72.79,59.98 73.01,59.77 C7.+ 72.61,58.6 C9.1
  Top 0.61: J3.P11 82.25,31.59 v82.25,30.8 82.25,31.55 J3.P12
  Top 1.016: UPPER1.PIN19 93.83,76.85 92.81,77.87 90.68,77.87 v78.73,65.92 72.79,59.98
  Bottom 0.152: 121.02,44.77 121.05,44.8
  Bottom 0.254: v82.25,30.8 83.95,32.5 83.95,34.8 79.7,39.05 66,39.05 56.48,29.53 43.31,29.53 41.68,27.9 v38.85,27.9 v29.55,27.9 | U$8.3 121.02,44.77
  Bottom 1.016: v78.73,65.92 v107.75,65.92 112.93,65.92 121.05,57.8 121.05,44.8 121.05,36.2 112.75,27.9 83.35,27.9 82.25,29 v82.25,30.8
BACKPACK_ENABLE  (via drill 0.3)
  Top 0.254: UPPER1.PIN3 96.37,65.98 v97.85,64.5
  Bottom 0.152: U$8.4 113.23,42.35 112,42.35
  Bottom 0.254: v97.85,64.5 112.45,64.5 118.55,58.4 118.55,47.1 117.53,46.08 111.59,46.08 111.13,45.62 111.13,43.22 112,42.35
BACKPACK_ENABLE1  (via drill 0.3)
  Top 0.254: UPPER2.PIN3 96.37,145.98 v97.85,144.5
  Bottom 0.152: U$21.4 113.23,122.35 112,122.35
  Bottom 0.254: v97.85,144.5 112.45,144.5 118.55,138.4 118.55,127.1 117.53,126.08 111.59,126.08 111.13,125.62 111.13,123.22 112,122.35
BAT+  (via drill 0.4)
  Top 0.254: U$12.P10 90.67,61.52 CBAT1.1
  Top 0.406: 62.33,68.72 D1.A1-2 | U6.7 85.23,55.12 v84.75,55.6
  Top 0.61: C12.1 Q2.8 Q2.7 Q2.6 Q2.5 88.26,62.92 CBAT1.1
  Top 1.016: 61.04,68.7 D1.A1-1 | D1.A1-2 62.31,68.7 61.04,68.7 | 61.04,68.7 59.15,68.7 U$7.+ | C12.1 80.43,60.61 75.59,55.77 v71.65,55.77 69.04,55.77 62.33,62.47 62.33,68.72
  Bottom 0.406: v84.75,55.6 71.82,55.6 v71.65,55.77
BAT+1  (via drill 0.4)
  Top 0.254: U$19.P10 90.67,141.51 CBAT2.1
  Top 0.406: 62.33,148.72 D2.A1-2 | U3.7 85.23,135.12 v84.75,135.6
  Top 0.61: C19.1 Q1.8 Q1.7 Q1.6 Q1.5 88.26,142.92 CBAT2.1
  Top 1.016: 61.04,148.7 D2.A1-1 | D2.A1-2 62.31,148.7 61.04,148.7 | 61.04,148.7 59.15,148.7 U$18.+ | C19.1 80.43,140.61 75.59,135.77 v71.65,135.77 69.04,135.77 62.33,142.47 62.33,148.72
  Bottom 0.406: v84.75,135.6 71.82,135.6 v71.65,135.77
BAT-  (via drill 0.35, 0.65)  (2 unrouted)
  Top 0.152: U$12.PAD 90.25,59.4 U$12.P6 90.67,58.18
  Top 0.2: 90.67,58.18 RSENSE3.1
  Top 0.508: CBAT1.2 90.54,63.5 91.08,63.5 91.09,63.49 91.55,63.49 91.56,63.5 v93.15,63.5
  Top 0.61: RSENSE3.1 92.53,57.97 | CREG1.2 93.62,59.09 93.62,63.03 v93.15,63.5
  Top 2.54: v63.95,77 61.85,77
  PWR 2.54: v93.15,63.5 79.65,77 v63.95,77
BAT-1  (via drill 0.35, 0.65)  (2 unrouted)
  Top 0.152: U$19.PAD 90.25,139.4 U$19.P6 90.67,138.18
  Top 0.2: 90.67,138.18 RSENSE1.1
  Top 0.508: CBAT2.2 90.54,143.5 91.08,143.5 91.09,143.49 91.55,143.49 91.56,143.5 v93.15,143.5
  Top 0.61: RSENSE1.1 92.53,137.97 | CREG2.2 93.62,139.09 93.62,143.03 v93.15,143.5
  Top 2.54: v63.95,157 61.85,157
  PWR 2.54: v93.15,143.5 79.65,157 v63.95,157
CHARGESUPPLY  (via drill 0.65)  (2 unrouted)
  Top 0.254: v76.15,53.5 76.15,53.73 RX1.1 79.93,55.12 80.15,55.12
  Top 0.305: U6.2 80.15,55.12 79.66,55.12
  Top 0.61: 78.05,53.5 77.99,53.5 | 77.99,53.5 v76.15,53.5 | R2.1 77.99,53.5
  Top 1.016: 74.15,71.5 74.15,73.5
  Top 2.54: v71.55,71.64 72.3,72.38 D3.K1 76.85,72.38
  PWR 2.54: v71.55,71.64 77.51,71.64 81.15,68 81.15,53.5 v76.15,53.5
CHARGESUPPLY1  (via drill 0.65)  (2 unrouted)
  Top 0.254: v76.15,133.5 76.15,133.73 RX2.1 79.93,135.12 80.15,135.12
  Top 0.305: U3.2 80.15,135.12 79.66,135.12
  Top 0.61: 78.05,133.5 77.99,133.5 | 77.99,133.5 v76.15,133.5 | R9.1 77.99,133.5
  Top 1.016: 74.15,151.5 74.15,153.5
  Top 2.54: v71.55,151.64 72.3,152.38 D4.K1 76.85,152.38
  PWR 2.54: v71.55,151.64 77.51,151.64 81.15,148 81.15,133.5 v76.15,133.5
CHARGING  (via drill 0.35)
  Top 0.254: U6.3 84.19,54.47 v88.15,50.5 | UPPER1.PIN9 111.65,69.12 v111.65,63.2 R5.2
  Bottom 0.254: v88.15,50.5 98.95,50.5 v111.65,63.2
CHARGING1  (via drill 0.35)
  Top 0.254: U3.3 84.19,134.47 v88.15,130.5 | UPPER2.PIN9 111.65,149.12 v111.65,143.2 R13.2
  Bottom 0.254: v88.15,130.5 98.95,130.5 v111.65,143.2
EEPROM_PROT  (via drill 0.3, 0.35)
  Top 0.152: v71.45,39.68 v71.45,34.5
  Top 0.254: J3.P1 71.44,34.48 v71.45,34.5
  Bottom 0.152: 71.63,39.5 v71.45,39.68
  Bottom 0.254: LOWER1.PIN2 56.59,23.84 67.55,34.8 71.15,34.8 v71.45,34.5 | U$8.5 115.35,39.69 116.45,38.59 116.45,36.3 114.85,34.7 85.85,34.7 81.05,39.5 71.63,39.5
  other vias: 46.47,23.84
EEPROM_PROT1  (via drill 0.3, 0.35)
  Top 0.152: v71.45,119.68 v71.45,114.5
  Top 0.254: J6.P1 71.44,114.48 v71.45,114.5
  Bottom 0.152: 71.63,119.5 v71.45,119.68
  Bottom 0.254: LOWER2.PIN2 56.59,103.84 67.55,114.8 71.15,114.8 v71.45,114.5 | U$21.5 115.35,119.69 116.45,118.59 116.45,116.3 114.85,114.7 85.85,114.7 81.05,119.5 71.63,119.5
  other vias: 46.47,103.84
GND  (via drill 0.3, 0.35)
  Top 0.152: U$9.+ v95.95,82.1
  Top 0.2: U$12.P5 88.03,59.2
  Top 0.254: J1.4 J2.4 | J2.3 J1.3 | J1.2 J2.2 | J2.1 J1.1 | U$11.GND2 57.38,62.83 v57.35,62.8 | U$11.GND 60.33,62.83 v60.35,62.8 | R3.1 31.8,44.45 v31.85,44.4 | R4.1 41.4,45.15 v41.45,45.1
  Top 0.305: J1.1 29.39,42.15 v28.65,41.4 | J1.2 28.89,41.65 v28.65,41.4 | J1.3 28.91,41.15 v28.65,41.4 | J1.4 29.41,40.65 v28.65,41.4
  Top 0.406: U$1.P$19 v42.95,68.1 | C2.- 34.52,50.17 v34.45,50.1 | C4.2 33.75,51.94 v33.75,53 | C5.2 35.88,48.67 v35.85,48.7 | U$2.2 v37.76,55.69 v37.75,55.7 | U1.28 30.64,56.99 v30.65,57 | C1.- 30.32,50.43 | 30.32,50.43 v30.35,50.4 | C6.2 28.94,50.43 30.32,50.43 | C3.2 v30.34,49.11 v30.35,49.1 | U$3.2 v21.96,50.51 v21.95,50.5 | U1.12 v21.14,66.01 v21.15,66 | U1.9 39.4,70.07 v40.99,71.66 | R1.1 67.17,64.48 v67.15,64.5 | U$4.2 71.2,65.45 v71.15,65.5 | C8.2 68.15,59.37 v68.15,60.5 | C9.2 75.76,58.77 C7.- 77.15,60.39 v77.15,61.5 77.31,61.5 C12.2 | 88.03,59.2 88.03,58.7 RSENSE3.2 88.76,56.91 v88.75,56.9 | U6.6 86.48,54.51 87.23,54.51 87.52,54.8 v88.15,54.8 | C11.2 90.46,54.89 v90.45,54.9 | U$1.P$12 v53.45,64.9 | v80.75,82.3 80.78,82.27 U$6.- 81.8,77.48 v82.13,77.48 | UPPER1.PIN20 90.15,73.1 v90.15,72.37 | U$1.P$8 v51.95,48.7 | U$1.P$3 v44.45,48.7
  Top 0.508: J3.P20 71.44,31.61 v72.05,31 72.7,31.66 J3.P19
  GND 0.254: v57.35,62.8 57.35,62.7 57.15,62.5 | v60.35,62.8 60.35,62.7 60.15,62.5 | v31.85,44.4 31.85,44.5 32.15,44.5 | v41.45,45.1 41.15,45.4 41.15,45.5
  GND 0.406: v42.95,68.1 43.35,68.5 44.15,68.5 | v34.45,50.1 34.15,50.4 34.15,50.5 | v33.75,53 33.75,52.9 34.15,52.5 | v35.85,48.7 35.95,48.7 36.15,48.5 | v37.75,55.7 37.95,55.7 38.15,55.5 | v30.65,57 30.15,57.5 | v30.35,50.4 30.25,50.4 30.15,50.5 | v30.35,49.1 30.15,49.3 30.15,49.5 | v21.95,50.5 22.15,50.5 | v21.15,66 21.15,65.5 | v40.99,71.66 41.15,71.5 | v88.75,56.9 89.15,56.5 | v88.15,54.8 88.15,54.5 | v90.45,54.9 90.15,54.6 | v53.45,64.9 53.45,64.8 53.15,64.5 | v80.75,82.3 80.95,82.5 81.15,82.5 | v82.13,77.48 82.15,77.5 | v90.15,72.37 90.15,72.5 | v51.95,48.7 52.15,48.5 | v44.45,48.7 44.25,48.5 44.15,48.5
  GND 0.508: v72.05,31 72.05,30.6 72.15,30.5
  Bottom 0.152: v116.54,47.31 v116.55,47.3
  Bottom 0.254: U$8.2 v116.54,47.31
  pour GND: 17.15,19.5 17.15,67.5 19.15,69.5 38.15,69.5 40.15,71.5 40.15,83.5 42.15,85.5 93.15,85.5 103.15,75.5 120.15,75.5 122.15,73.5 122.15,29.5 120.15,27.5 63.15,27.5 52.15,16.5 20.15,16.5
GND1  (via drill 0.3, 0.35)
  Top 0.152: U$22.+ v95.95,162.1
  Top 0.2: U$19.P5 88.03,139.2
  Top 0.254: J4.4 J5.4 | J5.3 J4.3 | J4.2 J5.2 | J5.1 J4.1 | U$20.GND2 57.38,142.82 v57.35,142.8 | U$20.GND 60.33,142.82 v60.35,142.8 | R11.1 31.8,124.45 v31.85,124.4 | R12.1 41.4,125.15 v41.45,125.1
  Top 0.305: J4.1 29.39,122.14 v28.65,121.4 | J4.2 28.89,121.64 v28.65,121.4 | J4.3 28.91,121.14 v28.65,121.4 | J4.4 29.41,120.64 v28.65,121.4
  Top 0.406: U$10.P$19 v42.95,148.1 | C13.- 34.52,130.17 v34.45,130.1 | C15.2 33.75,131.94 v33.75,133 | C17.2 35.88,128.67 v35.85,128.7 | U$13.2 v37.76,135.69 v37.75,135.7 | U2.28 30.64,136.99 v30.65,137 | C10.- 30.32,130.43 | 30.32,130.43 v30.35,130.4 | C16.2 28.94,130.43 30.32,130.43 | C14.2 v30.34,129.11 v30.35,129.1 | U$14.2 v21.96,130.51 v21.95,130.5 | U2.12 v21.14,146.01 v21.15,146 | U2.9 39.4,150.07 v40.99,151.66 | R10.1 67.17,144.48 v67.15,144.5 | U$15.2 71.2,145.45 v71.15,145.5 | C21.2 68.15,139.37 v68.15,140.5 | C22.2 75.76,138.76 C20.- 77.15,140.39 v77.15,141.5 77.31,141.5 C19.2 | 88.03,139.2 88.03,138.7 RSENSE1.2 88.76,136.91 v88.75,136.9 | U3.6 86.48,134.51 87.23,134.51 87.52,134.81 v88.15,134.81 | C18.2 90.46,134.89 v90.45,134.9 | U$10.P$12 v53.45,144.9 | v80.75,162.3 80.78,162.27 U$17.- 81.8,157.48 v82.13,157.48 | UPPER2.PIN20 90.15,153.1 v90.15,152.37 | U$10.P$8 v51.95,128.7 | U$10.P$3 v44.45,128.7
  Top 0.508: J6.P20 71.44,111.61 v72.05,111 72.7,111.66 J6.P19
  GND 0.254: v57.35,142.8 57.35,142.7 57.15,142.5 | v60.35,142.8 60.35,142.7 60.15,142.5 | v31.85,124.4 31.85,124.5 32.15,124.5 | v41.45,125.1 41.15,125.4 41.15,125.5
  GND 0.406: v42.95,148.1 43.35,148.5 44.15,148.5 | v34.45,130.1 34.15,130.4 34.15,130.5 | v33.75,133 33.75,132.9 34.15,132.5 | v35.85,128.7 35.95,128.7 36.15,128.5 | v37.75,135.7 37.95,135.7 38.15,135.5 | v30.65,137 30.15,137.5 | v30.35,130.4 30.25,130.4 30.15,130.5 | v30.35,129.1 30.15,129.3 30.15,129.5 | v21.95,130.5 22.15,130.5 | v21.15,146 21.15,145.5 | v40.99,151.66 41.15,151.5 | v88.75,136.9 89.15,136.5 | v88.15,134.81 88.15,134.5 | v90.45,134.9 90.15,134.6 | v53.45,144.9 53.45,144.8 53.15,144.5 | v80.75,162.3 80.95,162.5 81.15,162.5 | v82.13,157.48 82.15,157.5 | v90.15,152.37 90.15,152.5 | v51.95,128.7 52.15,128.5 | v44.45,128.7 44.25,128.5 44.15,128.5
  GND 0.508: v72.05,111 72.05,110.6 72.15,110.5
  Bottom 0.152: v116.54,127.31 v116.55,127.3
  Bottom 0.254: U$21.2 v116.54,127.31
  pour GND: 17.15,99.5 17.15,147.5 19.15,149.5 38.15,149.5 40.15,151.5 40.15,163.5 42.15,165.5 93.15,165.5 103.15,155.5 120.15,155.5 122.15,153.5 122.15,109.5 120.15,107.5 63.15,107.5 52.15,96.5 20.15,96.5
GPS_ENABLE
  Top 0.254: 37.15,46.75 39.65,46.75 R4.2
  Top 0.305: LOWER1.PIN16 38.69,18.94 38.69,17.24 39.74,16.2 50.16,16.2 51.15,17.19 51.15,33.06 37.47,46.75 37.15,46.75 36,46.75 32.15,50.6 32.15,52.5 34.15,54.5 36.56,54.5 U$2.3
GPS_ENABLE1
  Top 0.254: 37.15,126.75 39.65,126.75 R12.2
  Top 0.305: LOWER2.PIN16 38.69,98.94 38.69,97.25 39.74,96.2 50.16,96.2 51.15,97.19 51.15,113.06 37.47,126.75 37.15,126.75 36,126.75 32.15,130.6 32.15,132.5 34.15,134.5 36.56,134.5 U$13.3
GPS_RX
  Top 0.406: UPPER1.PIN5 101.45,58.9 91.15,48.6 54.35,48.6 53.45,49.5 U$1.P$9
GPS_RX1
  Top 0.406: UPPER2.PIN5 101.45,138.9 91.15,128.6 54.35,128.6 53.45,129.5 U$10.P$9
GPS_TX
  Top 0.406: UPPER1.PIN16 100.15,72.6 100.15,59.4 90.45,49.7 55.58,49.7 U$1.P$10
GPS_TX1
  Top 0.406: UPPER2.PIN16 100.15,152.6 100.15,139.4 90.45,129.7 55.58,129.7 U$10.P$10
HOTSWAP_INT  (via drill 0.35)
  Top 0.254: J3.P3 73.97,34.48 v73.95,34.5
  Bottom 0.254: LOWER1.PIN3 45.63,25.2 56.75,25.2 67.35,35.8 72.65,35.8 v73.95,34.5
  other vias: 43.93,23.5
HOTSWAP_INT1  (via drill 0.35)
  Top 0.254: J6.P3 73.97,114.47 v73.95,114.5
  Bottom 0.254: LOWER2.PIN3 45.63,105.2 56.75,105.2 67.35,115.8 72.65,115.8 v73.95,114.5
  other vias: 43.93,103.5
MOD_G0
  Top 0.254: LOWER1.PIN1 49.01,31 43.86,36.14 J2.13 J1.13
MOD_G1
  Top 0.254: LOWER2.PIN1 49.01,111 43.86,116.14 J5.13 J4.13
MOD_G2  (via drill 0.3, 0.35)
  Top 0.152: v72.65,40.18 v72.65,34.6
  Top 0.254: J3.P2 72.65,33.52 v72.65,34.6
  Bottom 0.254: LOWER1.PIN18 43.93,22.23 46.2,24.5 48.15,24.5 56.65,24.5 67.45,35.3 71.95,35.3 v72.65,34.6 | U$8.6 115.3,37.15 115.65,36.8 115.65,36.4 114.56,35.3 85.98,35.3 81.1,40.18 v72.65,40.18
  other vias: 43.93,19.1
MOD_G3  (via drill 0.3, 0.35)
  Top 0.152: v72.65,120.18 v72.65,114.6
  Top 0.254: J6.P2 72.65,113.53 v72.65,114.6
  Bottom 0.254: LOWER2.PIN18 43.93,102.23 46.2,104.5 48.15,104.5 56.65,104.5 67.45,115.3 71.95,115.3 v72.65,114.6 | U$21.6 115.3,117.15 115.65,116.8 115.65,116.4 114.56,115.31 85.98,115.31 81.1,120.18 v72.65,120.18
  other vias: 43.93,99.1
MOD_G4  (via drill 0.35)
  Top 0.254: J6.P5 76.45,113.53 v76.45,114.5
  Bottom 0.254: LOWER2.PIN4 44.5,106.61 57.01,106.61 67.01,116.61 74.34,116.61 v76.45,114.5
  other vias: 41.39,103.5
MOD_G5  (via drill 0.35)
  Top 0.254: J3.P5 76.45,33.53 v76.45,34.5
  Bottom 0.254: LOWER1.PIN4 44.5,26.61 57.01,26.61 67.01,36.61 74.34,36.61 v76.45,34.5
  other vias: 41.39,23.5
MOD_G6
  Top 0.254: LOWER2.PIN19 45.15,100.08 45.15,113.57 43.08,115.64 J5.14 J4.14
MOD_G7
  Top 0.254: LOWER2.PIN20 49.01,101.31 49.92,102.22 49.92,111.37 44.65,116.64 J5.12 J4.12
MOD_G13
  Top 0.254: LOWER1.PIN19 45.15,20.08 45.15,33.57 43.08,35.64 J2.14 J1.14
MOD_G14
  Top 0.254: LOWER1.PIN20 49.01,21.31 49.92,22.22 49.92,31.37 44.65,36.64 J2.12 J1.12
MOD_MISO  (via drill 0.3, 0.35)
  Top 0.152: v82.85,42.2 82.86,42.19
  Top 0.254: J3.P10 82.86,34.48 | 82.86,34.48 v82.85,34.5 | 82.86,42.19 82.86,34.48
  Bottom 0.254: LOWER1.PIN10 28.22,25.91 40.26,25.91 43.48,29.13 56.65,29.13 66.17,38.65 78.7,38.65 v82.85,34.5 | U$8.10 106.95,44.77 104.38,42.2 v82.85,42.2
  other vias: 26.15,23.84
MOD_MISO1  (via drill 0.3, 0.35)
  Top 0.152: v82.85,122.2 82.86,122.19
  Top 0.254: J6.P10 82.86,114.48 | 82.86,114.48 v82.85,114.5 | 82.86,122.19 82.86,114.48
  Bottom 0.254: LOWER2.PIN10 28.22,105.91 40.26,105.91 43.48,109.13 56.65,109.13 66.17,118.64 78.7,118.64 v82.85,114.5 | U$21.10 106.95,124.77 104.38,122.2 v82.85,122.2
  other vias: 26.15,103.84
MOD_MOSI  (via drill 0.3, 0.35)
  Top 0.152: v80.35,43 80.33,42.98
  Top 0.254: J3.P8 80.33,34.58 | 80.33,34.58 v80.35,34.6 | 80.33,42.98 80.33,34.58
  Bottom 0.152: v80.36,43.01 v80.35,43
  Bottom 0.254: LOWER1.PIN12 30.57,20.64 30.57,23.77 31.3,24.5 40,24.5 43.81,28.31 56.99,28.31 66.51,37.83 77.12,37.83 v80.35,34.6 | U$8.11 106.95,47.31 102.65,43.01 v80.36,43.01
  other vias: 28.69,18.76
MOD_MOSI1  (via drill 0.3, 0.35)
  Top 0.152: v80.35,123 80.33,122.97
  Top 0.254: J6.P8 80.33,114.58 | 80.33,114.58 v80.35,114.6 | 80.33,122.97 80.33,114.58
  Bottom 0.152: v80.36,123.01 v80.35,123
  Bottom 0.254: LOWER2.PIN12 30.57,100.64 30.57,103.77 31.3,104.5 40,104.5 43.81,108.31 56.99,108.31 66.51,117.83 77.12,117.83 v80.35,114.6 | U$21.11 106.95,127.31 102.65,123.01 v80.36,123.01
  other vias: 28.69,98.76
MOD_SCK  (via drill 0.3, 0.35)
  Top 0.254: J3.P9 81.59,34.45 v81.55,34.5 v81.55,44.2
  Bottom 0.254: LOWER1.PIN9 30.35,25.5 40.43,25.5 43.65,28.72 56.82,28.72 66.34,38.24 77.81,38.24 v81.55,34.5 | U$8.12 106.95,49.85 101.3,44.2 v81.55,44.2
  other vias: 28.69,23.84
MOD_SCK1  (via drill 0.3, 0.35)
  Top 0.254: J6.P9 81.59,114.45 v81.55,114.5 v81.55,124.2
  Bottom 0.254: LOWER2.PIN9 30.35,105.5 40.43,105.5 43.65,108.72 56.82,108.72 66.34,118.24 77.81,118.24 v81.55,114.5 | U$21.12 106.95,129.85 101.3,124.2 v81.55,124.2
  other vias: 28.69,103.84
MOD_SCL  (via drill 0.3, 0.35)
  Top 0.152: v77.75,40.9 77.75,40.6 77.78,40.56
  Top 0.254: J3.P6 77.78,34.47 | 77.78,34.47 v77.75,34.5 | 77.78,40.56 77.78,34.47
  Bottom 0.152: 77.96,40.69 v77.75,40.9
  Bottom 0.254: LOWER1.PIN13 35.75,19.1 44.15,27.5 57.33,27.5 66.84,37.02 75.23,37.02 v77.75,34.5 | U$8.8 106.92,39.69 105.93,40.69 77.96,40.69
  other vias: 31.23,19.1
MOD_SCL1  (via drill 0.3, 0.35)
  Top 0.152: v77.75,120.9 77.75,120.6 77.78,120.56
  Top 0.254: J6.P6 77.78,114.47 | 77.78,114.47 v77.75,114.5 | 77.78,120.56 77.78,114.47
  Bottom 0.152: 77.96,120.69 v77.75,120.9
  Bottom 0.254: LOWER2.PIN13 35.75,99.1 44.15,107.5 57.33,107.5 66.84,117.02 75.23,117.02 v77.75,114.5 | U$21.8 106.92,119.69 105.93,120.69 77.96,120.69
  other vias: 31.23,99.1
MOD_SDA  (via drill 0.3, 0.35)
  Top 0.152: v79.05,41.37 v79.06,41.36
  Top 0.254: J3.P7 v79.06,34.5 | v79.06,34.5 v79.05,34.5 | v79.06,41.36 v79.06,34.5
  Bottom 0.254: v79.05,34.5 76.12,37.43 66.68,37.43 57.16,27.91 43.98,27.91 39.58,23.5 LOWER1.PIN8 | U$8.9 106.95,42.23 105.85,41.13 79.29,41.13 v79.05,41.37
  other vias: 31.23,23.5
MOD_SDA1  (via drill 0.3, 0.35)
  Top 0.152: v79.05,121.37 v79.06,121.36
  Top 0.254: J6.P7 v79.06,114.5 | v79.06,114.5 v79.05,114.5 | v79.06,121.36 v79.06,114.5
  Bottom 0.254: v79.05,114.5 76.12,117.43 66.68,117.43 57.16,107.91 43.98,107.91 39.58,103.5 LOWER2.PIN8 | U$21.9 106.95,122.23 105.85,121.13 79.29,121.13 v79.05,121.37
  other vias: 31.23,103.5
N$1
  Top 0.305: C3.1 26.07,49.11 U$3.4
N$2
  Top 0.305: U$2.4 35.46,51.9 C4.1
N$3
  Top 0.305: U$1.P$1 41.3,50.17 C2.+ C5.1
  Top 0.406: U$2.5 38.71,50.2 C2.+
N$4
  Top 0.254: U$1.P$11 U$11.ANT
N$5
  Top 0.406: R2.2 81.07,52.76 U6.4
N$6
  Top 0.406: U$4.4 70.25,59.05 C8.1
N$7
  Top 0.254: U$2.1 38.76,54.3 FB1.2
N$8
  Top 0.406: U$4.3 70.25,64.19 R1.2 69.92,64.51 69.92,73.47 65.97,77.43 65.97,83.2 63.05,86.12 48.69,86.11 47.14,84.56 45.14,82.56 U$5.2
N$9  (via drill 5.3 pad 8)
  other vias: 60.15,43.5
N$11
  Top 0.305: C14.1 26.07,129.11 U$14.4
N$12
  Top 0.305: U$13.4 35.46,131.9 C15.1
N$13
  Top 0.305: U$10.P$1 41.3,130.17 C13.+ C17.1
  Top 0.406: U$13.5 38.71,130.2 C13.+
N$14  (1 unrouted)
  Top 0.61: RX1.2 81.49,56.31 81.74,56.57 | 81.74,56.57 82.13,56.18 82.13,55.82 81.98,55.82 81.74,56.06 | 81.74,56.57 82.38,57.2 Q2.1 Q2.2 Q2.3
N$16  (1 unrouted)
  Top 0.61: RX2.2 81.49,136.31 81.74,136.57 | 81.74,136.57 82.13,136.18 82.13,135.82 81.98,135.82 81.74,136.06 | 81.74,136.57 82.38,137.2 Q1.1 Q1.2 Q1.3
N$17
  Top 0.305: Q2.4 86.19,56.44 86.43,56.2 U6.8
N$18
  Top 0.305: C11.1 88.34,53.81 U6.5
N$19
  Top 0.2: U$12.P7 92.63,59.8 CREG1.1
N$20
  Top 0.305: Q1.4 86.19,136.44 86.43,136.2 U3.8
N$21
  Top 0.305: C18.1 88.34,133.81 U3.5
N$22
  Top 0.2: U$19.P7 92.63,139.8 CREG2.1
N$23
  Top 0.406: R9.2 81.07,132.76 U3.4
N$24
  Top 0.406: U$15.4 70.25,139.05 C21.1
N$25
  Top 0.406: U$15.3 70.25,144.19 R10.2 69.92,144.51 69.92,153.47 65.97,157.43 65.97,163.2 63.05,166.12 48.69,166.11 47.14,164.56 45.14,162.56 U$16.2
N$26
  Top 0.254: U$10.P$11 U$20.ANT
N$27
  Top 0.254: U$13.1 38.76,134.3 FB2.2
N$28  (via drill 5.3 pad 8)
  other vias: 60.15,123.5
RAD_SCL  (via drill 0.35)
  Top 0.2: U$12.P3 87.35,60.2 86.96,60.59 v86.96,61.26
  Top 0.254: LOWER1.PIN14 33.77,20.63 34.68,21.54 34.68,27.9 | 34.68,27.9 34.68,28.97 30.13,33.52 J1.16 J2.16 41.51,34.64 v43.55,32.6 | R6.1 34.68,27.9
  Bottom 0.406: v43.55,32.6 43.55,33.3 68.75,58.5 84.2,58.5 v86.96,61.26
RAD_SCL1  (via drill 0.35)
  Top 0.2: U$19.P3 87.35,140.2 86.96,140.59 v86.96,141.26
  Top 0.254: LOWER2.PIN14 33.77,100.63 34.68,101.54 34.68,107.9 | 34.68,107.9 34.68,108.97 30.13,113.52 J4.16 J5.16 41.51,114.64 v43.55,112.6 | R14.1 34.68,107.9
  Bottom 0.406: v43.55,112.6 43.55,113.3 68.75,138.5 84.2,138.5 v86.96,141.26
RAD_SDA  (via drill 0.35)
  Top 0.2: U$12.P4 84.74,59.8 84.28,60.26
  Top 0.254: 84.28,60.26 v84.27,60.24 | LOWER1.PIN7 33.77,27.9 | 33.77,27.9 33.77,28.88 29.15,33.5 29.15,34.8 29.5,35.14 J1.15 J2.15 42.29,35.14 v43.19,34.24 | R7.1 33.77,27.9
  Bottom 0.406: v43.19,34.24 69.19,60.24 v84.27,60.24
RAD_SDA1  (via drill 0.35)
  Top 0.2: U$19.P4 84.74,139.8 84.28,140.26
  Top 0.254: 84.28,140.26 v84.27,140.25 | LOWER2.PIN7 33.77,107.9 | 33.77,107.9 33.77,108.88 29.15,113.5 29.15,114.8 29.5,115.14 J4.15 J5.15 42.29,115.14 v43.19,114.24 | R15.1 33.77,107.9
  Bottom 0.406: v43.19,114.24 69.19,140.25 v84.27,140.25
RADIO_MISO  (via drill 0.35, 0.4)
  Top 0.254: U1.17 20.8,60.93 v21.16,61.29 23.54,63.67 35.08,63.67 45.29,73.88 51.5,73.88 52.17,73.22 v53.8,73.22 | J2.9 J1.9 30.1,38.12 24.65,38.12 21.15,41.62 v21.15,52.5
  Bottom 0.254: v53.8,73.22 54.07,73.49 103.43,73.49 103.83,73.1 105.73,73.1 UPPER1.PIN14 | v21.15,52.5 v21.15,61.28 v21.16,61.29
  other vias: 106.53,73.9
RADIO_MISO1  (via drill 0.35, 0.4)
  Top 0.254: U2.17 20.8,140.93 v21.16,141.29 23.54,143.67 35.08,143.67 45.29,153.88 51.5,153.88 52.17,153.22 v53.8,153.22 | J5.9 J4.9 30.1,118.12 24.65,118.12 21.15,121.62 v21.15,132.5
  Bottom 0.254: v53.8,153.22 54.07,153.49 103.43,153.49 103.83,153.1 105.73,153.1 UPPER2.PIN14 | v21.15,132.5 v21.15,141.28 v21.16,141.29
  other vias: 106.53,153.9
RADIO_MOSI  (via drill 0.35, 0.4)
  Top 0.254: U1.15 20.1,62.96 v21.2,64.06 21.26,64.12 34.95,64.12 45.23,74.4 v51.95,74.4 | J1.10 J2.10 42.3,37.65 v43.15,38.5
  Bottom 0.254: UPPER1.PIN15 52.45,73.9 v51.95,74.4 | v43.15,38.5 43.15,57.5 34.15,66.5 23.64,66.5 v21.2,64.06
  other vias: 103.99,73.9 103.99,73.9
RADIO_MOSI1  (via drill 0.35, 0.4)
  Top 0.254: U2.15 20.1,142.96 v21.2,144.06 21.26,144.12 34.95,144.12 45.23,154.4 v51.95,154.4 | J4.10 J5.10 42.3,117.64 v43.15,118.5
  Bottom 0.254: UPPER2.PIN15 52.45,153.9 v51.95,154.4 | v43.15,118.5 43.15,137.5 34.15,146.5 23.64,146.5 v21.2,144.06
  other vias: 103.99,153.9 103.99,153.9
RADIO_SCK  (via drill 0.35, 0.4)  (1 unrouted)
  Top 0.254: U1.18 v22.15,59.91 22.63,59.91 23.34,59.2 27.51,59.2 31.57,63.26 35.25,63.26 45.27,73.29 50.6,73.29 v51.36,72.53 | J2.11 J1.11 24.5,37.15 v23.15,38.5
  Bottom 0.254: v103.99,70.87 101.84,73.02 54.74,73.02 54.25,72.53 v51.36,72.53 | v23.15,38.5 23.15,58.91 v22.15,59.91
RADIO_SCK1  (via drill 0.35, 0.4)  (1 unrouted)
  Top 0.254: U2.18 v22.15,139.91 22.63,139.91 23.34,139.2 27.51,139.2 31.57,143.26 35.25,143.26 45.27,153.29 50.6,153.29 v51.36,152.53 | J5.11 J4.11 24.5,117.14 v23.15,118.5
  Bottom 0.254: v103.99,150.87 101.84,153.02 54.74,153.02 54.25,152.53 v51.36,152.53 | v23.15,118.5 23.15,138.91 v22.15,139.91
SOL+
  Top 1.016: U$6.+ 78.78,68.73 78.75,68.7 77.54,68.7 D3.A2-2 D3.A2-1
SOL+1
  Top 1.016: U$17.+ 78.78,148.73 78.75,148.7 77.54,148.7 D4.A2-2 D4.A2-1
UNREG  (via drill 0.3, 0.35, 0.6)
  Top 0.254: J1.8 J2.8 | J2.7 J1.7 | J1.6 J2.6 | J2.5 J1.5 | U$3.1 24.3,52.49 v24.35,52.49 | FB1.1 35.55,58 35.15,57.6 v35.15,56.5
  Top 0.305: J1.5 29.39,40.15 v28.65,39.4 | J1.8 29.41,38.65 v28.65,39.4 | J1.7 28.91,39.15 v28.65,39.4 | J1.6 28.89,39.65 v28.65,39.4 | v42.15,81.6 U$5.C
  Top 0.508: J3.P14 79.06,31.59 v79.65,31 80.33,31.68 J3.P13 | U$4.1 72.15,63.5 v73.15,64.5
  Top 1.27: D1.K1 D1.K2 66.27,72.38 v67.15,71.5
  PWR 0.254: v24.35,52.49 24.16,52.49 24.15,52.5
  PWR 0.305: v28.65,39.4 28.75,39.5 29.15,39.5
  PWR 0.508: v79.65,31 80.15,31.5
  Bottom 0.254: U$8.1 113.65,50.9 v114.35,51.6
  pour PWR: 17.15,19.5 17.15,67.5 19.15,69.5 38.15,69.5 40.15,71.5 40.15,83.5 42.15,85.5 58.15,85.5 60.15,83.5 60.15,76.5 62.15,74.5 68.15,74.5 69.15,73.5 69.15,70.5 71.15,68.5 72.15,68.5 74.15,66.5 74.15,52.5 76.15,50.5 82.15,50.5 84.15,52.5 84.15,60.5 85.15,61.5 94.15,61.5 95.15,62.5 95.15,67.5 92.15,70.5 90.15,70.5 81.15,79.5 65.15,79.5 63.15,81.5 63.15,83.5 65.15,85.5 93.15,85.5 103.15,75.5 120.15,75.5 122.15,73.5 122.15,29.5 120.15,27.5 63.15,27.5 52.15,16.5 20.15,16.5
UNREG1  (via drill 0.3, 0.35, 0.6)
  Top 0.254: J4.8 J5.8 | J5.7 J4.7 | J4.6 J5.6 | J5.5 J4.5 | U$14.1 24.3,132.5 v24.35,132.5 | FB2.1 35.55,138 35.15,137.6 v35.15,136.5
  Top 0.305: J4.5 29.39,120.14 v28.65,119.4 | J4.8 29.41,118.64 v28.65,119.4 | J4.7 28.91,119.14 v28.65,119.4 | J4.6 28.89,119.64 v28.65,119.4 | v42.15,161.6 U$16.C
  Top 0.508: J6.P14 79.06,111.59 v79.65,111 80.33,111.67 J6.P13 | U$15.1 72.15,143.5 v73.15,144.5
  Top 1.27: D2.K1 D2.K2 66.27,152.38 v67.15,151.5
  PWR 0.254: v24.35,132.5 24.16,132.5 24.15,132.5
  PWR 0.305: v28.65,119.4 28.75,119.5 29.15,119.5
  PWR 0.508: v79.65,111 80.15,111.5
  Bottom 0.254: U$21.1 113.65,130.9 v114.35,131.6
  pour PWR: 17.15,99.5 17.15,147.5 19.15,149.5 38.15,149.5 40.15,151.5 40.15,163.5 42.15,165.5 58.15,165.5 60.15,163.5 60.15,156.5 62.15,154.5 68.15,154.5 69.15,153.5 69.15,150.5 71.15,148.5 72.15,148.5 74.15,146.5 74.15,132.5 76.15,130.5 82.15,130.5 84.15,132.5 84.15,140.5 85.15,141.5 94.15,141.5 95.15,142.5 95.15,147.5 92.15,150.5 90.15,150.5 81.15,159.5 65.15,159.5 63.15,161.5 63.15,163.5 65.15,165.5 93.15,165.5 103.15,155.5 120.15,155.5 122.15,153.5 122.15,109.5 120.15,107.5 63.15,107.5 52.15,96.5 20.15,96.5
V1  (via drill 0.35)
  Top 0.61: D2.A2-1 64.25,148.09 | 64.25,148.09 v64.25,147.2 | D2.A2-2 64.25,148.1 64.25,148.09 | D4.A1-2 74.35,148.1 | 74.35,148.1 v74.35,147.2 | D4.A1-1 73.72,148.73 74.35,148.1
  Bottom 0.61: LOWER2.PIN11 23.15,98.76 18.15,103.76 18.15,144.5 22.15,148.5 33.15,148.5 41.15,140.5 46.15,140.5 52.85,147.2 v64.25,147.2 v74.35,147.2
  other vias: 26.15,98.76
V5  (via drill 0.35)
  Top 0.61: D1.A2-1 64.25,68.09 | 64.25,68.09 v64.25,67.2 | D1.A2-2 64.25,68.1 64.25,68.09 | D3.A1-2 74.35,68.1 | 74.35,68.1 v74.35,67.2 | D3.A1-1 73.72,68.73 74.35,68.1
  Bottom 0.61: LOWER1.PIN11 23.15,18.76 18.15,23.76 18.15,64.5 22.15,68.5 33.15,68.5 41.15,60.5 46.15,60.5 52.85,67.2 v64.25,67.2 v74.35,67.2
  other vias: 26.15,18.76
VBACKUP  (via drill 0.4, 0.45)
  Top 0.305: v46.02,64.3 46.02,50.4 U$1.P$4
  Bottom 0.305: UPPER1.PIN1 91.27,69.14 50.86,69.14 v46.02,64.3
  other vias: 91.29,69.16
VBACKUP1  (via drill 0.4, 0.45)
  Top 0.305: v46.02,144.3 46.02,130.4 U$10.P$4
  Bottom 0.305: UPPER2.PIN1 91.27,149.14 50.86,149.14 v46.02,144.3
  other vias: 91.29,149.16
WIFI_3V1
  Top 0.254: U2.22 24.54,133.19 24.55,133.18
  Top 0.305: 25.62,133.18 U$14.5 27.12,131.46 27.17,131.51 | 25.62,133.18 25.62,135.15 U2.23 | C16.1 27.17,131.51 | 27.17,131.51 C10.+ | 25.62,133.18 24.55,133.18 22.51,133.18 U2.20 17.07,138.62 17.07,147.81 17.3,148.04 U2.10
WIFI_3V3
  Top 0.254: U1.22 24.54,53.19 24.55,53.18
  Top 0.305: 25.62,53.18 U$3.5 27.12,51.46 27.17,51.51 | 25.62,53.18 25.62,55.15 U1.23 | C6.1 27.17,51.51 | 27.17,51.51 C1.+ | 25.62,53.18 24.55,53.18 22.51,53.18 U1.20 17.07,58.62 17.07,67.81 17.3,68.04 U1.10
WIFI_CS  (via drill 0.3, 0.4)
  Top 0.254: v27.22,58.33 31.74,62.86 35.41,62.86 45.33,72.77 49.52,72.77 v49.68,72.61 | U1.16 20.19,61.94 v20.65,62.4
  Bottom 0.254: UPPER1.PIN13 105.22,70.05 51.1,70.05 49.68,71.47 v49.68,72.61 | v20.65,62.4 21.35,62.4 25.42,58.33 v27.22,58.33
  other vias: 109.07,73.9
WIFI_CS1  (via drill 0.3, 0.4)
  Top 0.254: v27.22,138.33 31.74,142.86 35.41,142.86 45.33,152.77 49.52,152.77 v49.68,152.61 | U2.16 20.19,141.94 v20.65,142.4
  Bottom 0.254: UPPER2.PIN13 105.22,150.05 51.1,150.05 49.68,151.47 v49.68,152.61 | v20.65,142.4 21.35,142.4 25.42,138.33 v27.22,138.33
  other vias: 109.07,153.9
WIFI_ENABLE
  Top 0.254: 28.15,45.75 30.05,45.75 R3.2
  Top 0.305: U$3.3 27.08,45.75 28.15,45.75 28.21,45.75 31.36,42.6 40.97,42.6 50.65,32.92 50.65,17.33 49.97,16.66 40.93,16.66 40.15,17.43 40.15,22.2 LOWER1.PIN5
WIFI_ENABLE1
  Top 0.254: 28.15,125.75 30.05,125.75 R11.2
  Top 0.305: U$14.3 27.08,125.75 28.15,125.75 28.21,125.75 31.36,122.6 40.97,122.6 50.65,112.92 50.65,97.33 49.97,96.66 40.93,96.66 40.15,97.43 40.15,102.2 LOWER2.PIN5
WIFI_IRQ  (via drill 0.35)
  Top 0.203: v46.02,75.73 45.2,74.91 45.17,74.91
  Top 0.254: U1.13 31.42,64.99 32.21,65.79 36.04,65.79 45.17,74.91
  Bottom 0.203: UPPER1.PIN12 111.29,74.56 53.6,74.56 52.42,75.73 v46.02,75.73
  other vias: 111.61,74.24
WIFI_IRQ1  (via drill 0.35)
  Top 0.203: v46.02,155.73 45.2,154.91 45.17,154.91
  Top 0.254: U2.13 31.42,144.99 32.21,145.79 36.04,145.79 45.17,154.91
  Bottom 0.203: UPPER2.PIN12 111.29,154.56 53.6,154.56 52.42,155.73 v46.02,155.73
  other vias: 111.61,154.24
WIFI_RST  (via drill 0.4)
  Top 0.254: U1.4 33.83,60.93 35.23,62.32 v44.96,62.32
  Bottom 0.254: UPPER1.PIN8 107.76,68.19 50.92,68.19 45.06,62.32 v44.96,62.32
  other vias: 109.07,69.5
WIFI_RST1  (via drill 0.4)
  Top 0.254: U2.4 33.83,140.93 35.23,142.32 v44.96,142.32
  Bottom 0.254: UPPER2.PIN8 107.76,148.19 50.92,148.19 45.06,142.32 v44.96,142.32
  other vias: 109.07,149.5
WIFI_WAKE  (via drill 0.35, 0.4)
  Top 0.203: UPPER1.PIN7 105.63,69.5 105.61,69.48 105.16,69.94 105.16,75.89 104.7,76.34 v103.42,76.34
  Top 0.254: U1.11 31.42,67.02 32.25,66.19 34.5,66.19 36.12,67.81 v36.12,68.72
  Bottom 0.203: v103.42,76.34 46.31,76.34 46.29,76.36 43.76,76.36 v36.12,68.72
WIFI_WAKE1  (via drill 0.35, 0.4)
  Top 0.203: UPPER2.PIN7 105.63,149.5 105.61,149.49 105.16,149.94 105.16,155.89 104.7,156.34 v103.42,156.34
  Top 0.254: U2.11 31.42,147.02 32.25,146.19 34.5,146.19 36.12,147.81 v36.12,148.72
  Bottom 0.203: v103.42,156.34 46.31,156.34 46.29,156.37 43.76,156.37 v36.12,148.72
XBTN  (via drill 0.35)
  Top 0.152: 84.52,44.88 R8.2 | U$9.- 98.45,78.3
  Top 0.254: J3.P4 75.25,34.41 v75.15,34.5 75.17,34.52 75.17,39.54 80.51,44.88 84.52,44.88 | R8.2 88.21,44.75 102.71,59.25 102.71,76.64 101.05,78.3 98.45,78.3
  Bottom 0.254: LOWER1.PIN17 41.39,22.14 45.15,25.9 56.88,25.9 67.18,36.21 72.92,36.21 72.92,36.2 73.45,36.2 v75.15,34.5
  other vias: 41.39,19.1
XBTN1  (via drill 0.35)
  Top 0.152: 84.52,124.88 R16.2 | U$22.- 98.45,158.3
  Top 0.254: J6.P4 75.25,114.41 v75.15,114.5 75.17,114.52 75.17,119.54 80.51,124.88 84.52,124.88 | R16.2 88.21,124.75 102.71,139.25 102.71,156.64 101.05,158.3 98.45,158.3
  Bottom 0.254: LOWER2.PIN17 41.39,102.14 45.15,105.9 56.88,105.9 67.18,116.21 72.92,116.21 72.92,116.2 73.45,116.2 v75.15,114.5
  other vias: 41.39,99.1

## Text on the board
Top: DARWIN+RADIO+PA2
tNames: BTN | OFF|ON | BATTERY | SOLAR | WIFI | GPS | BTN | OFF|ON | BATTERY | SOLAR | WIFI | GPS